# Altium PCB Board.PcbDoc (part 1 of 2)
Units mm, origin at the board's own origin, x right, y up, seen from the top; angles counter-clockwise.
Board outline 102.36 x 101.73 mm, 4 copper layers (Top Layer, Layer 1, Layer 2, Bottom Layer), stack 1.57 mm thick; 70 components, 60 nets, 262 pads, 135 vias.
Unrouted connection lines stored in the file: 4.
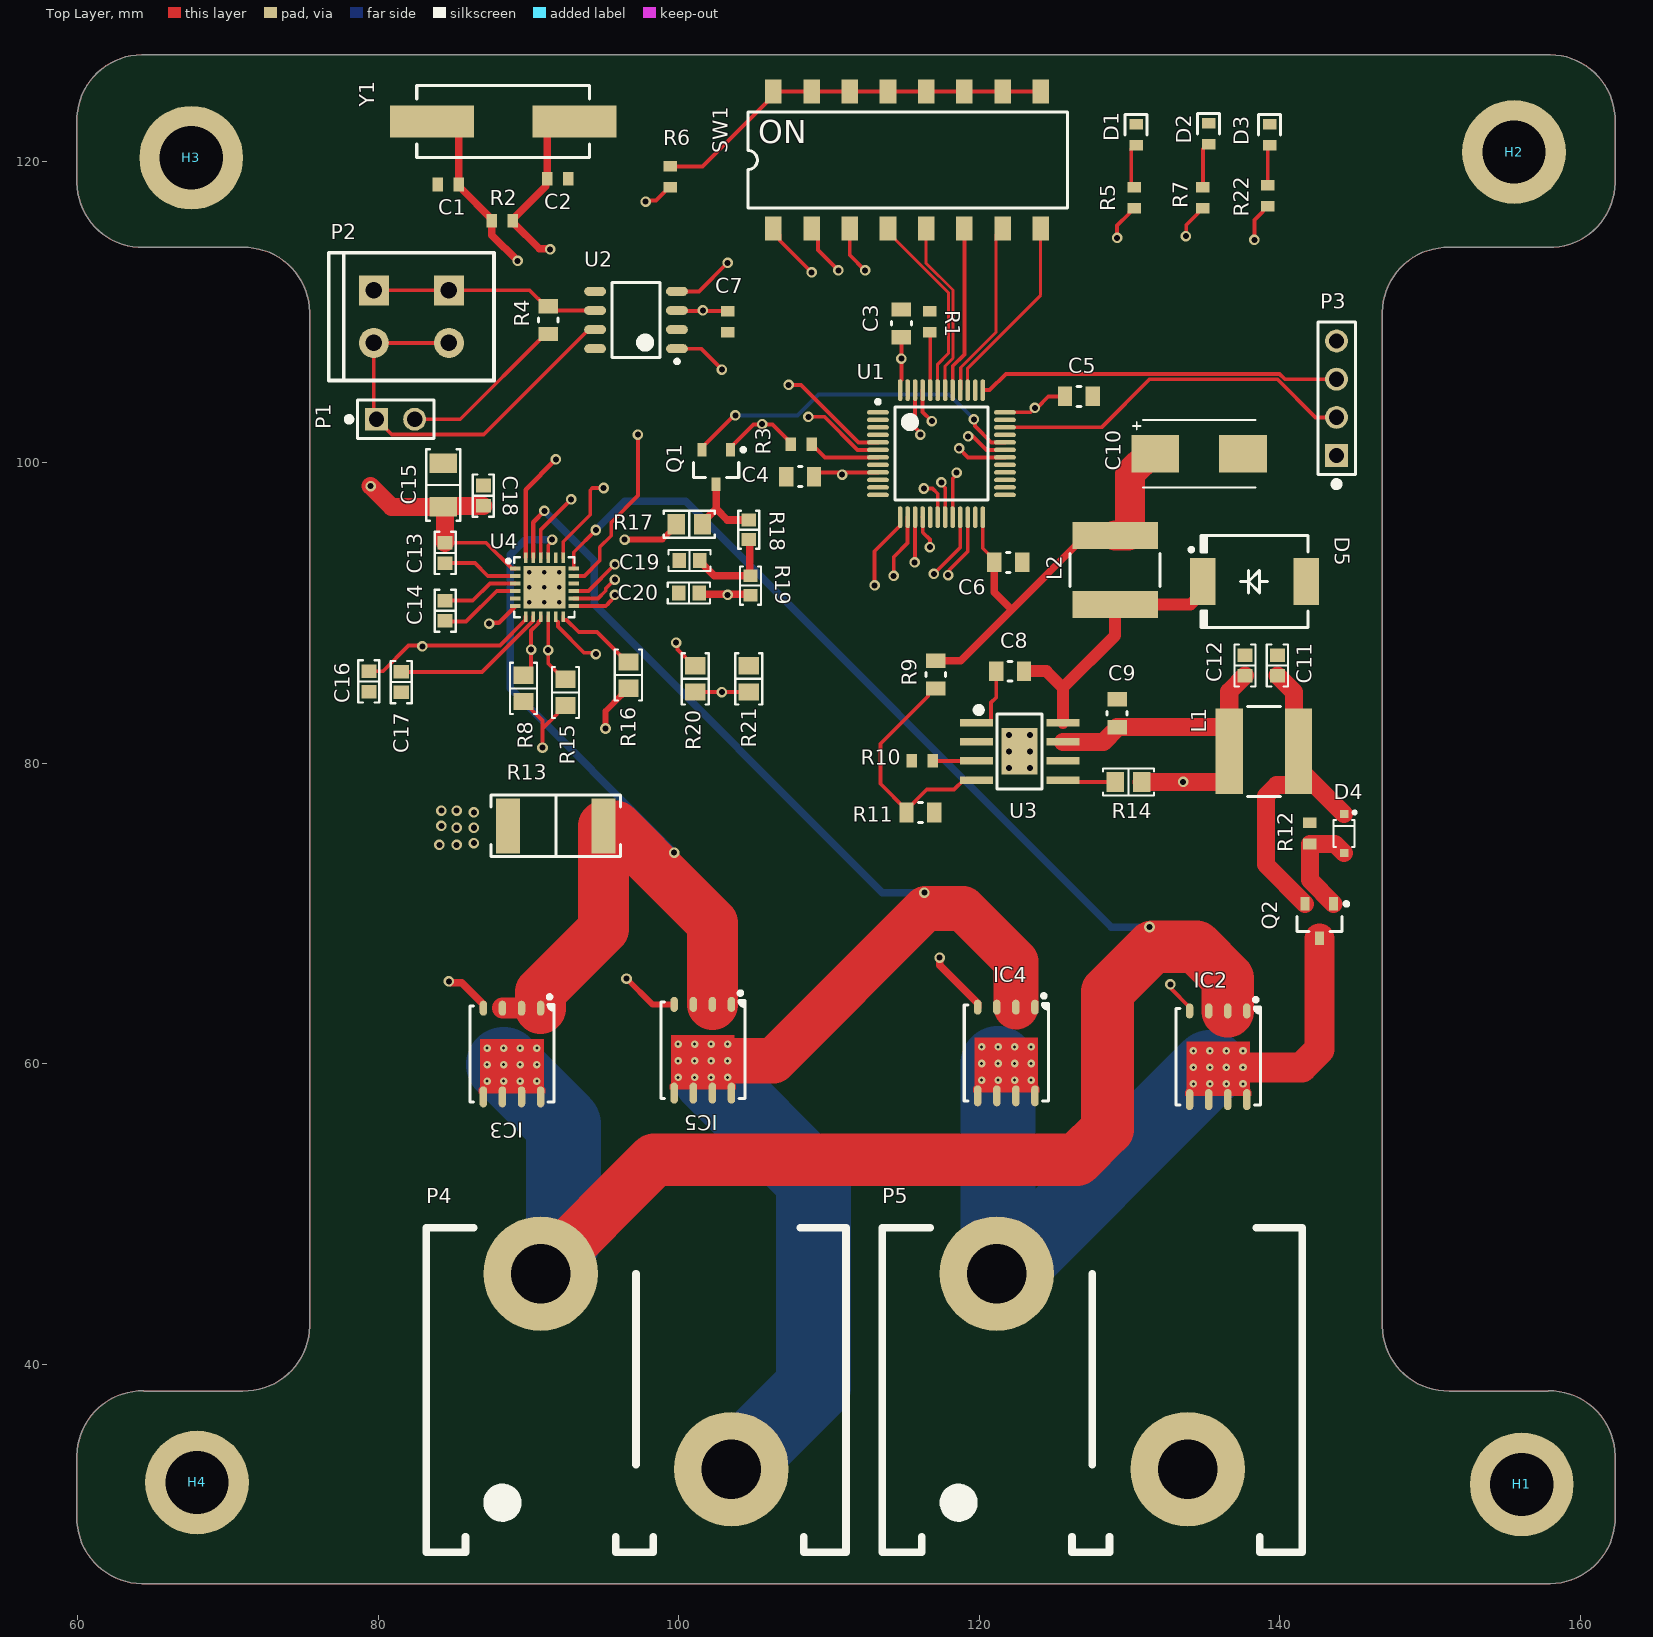
[diagram p0: Top Layer view]
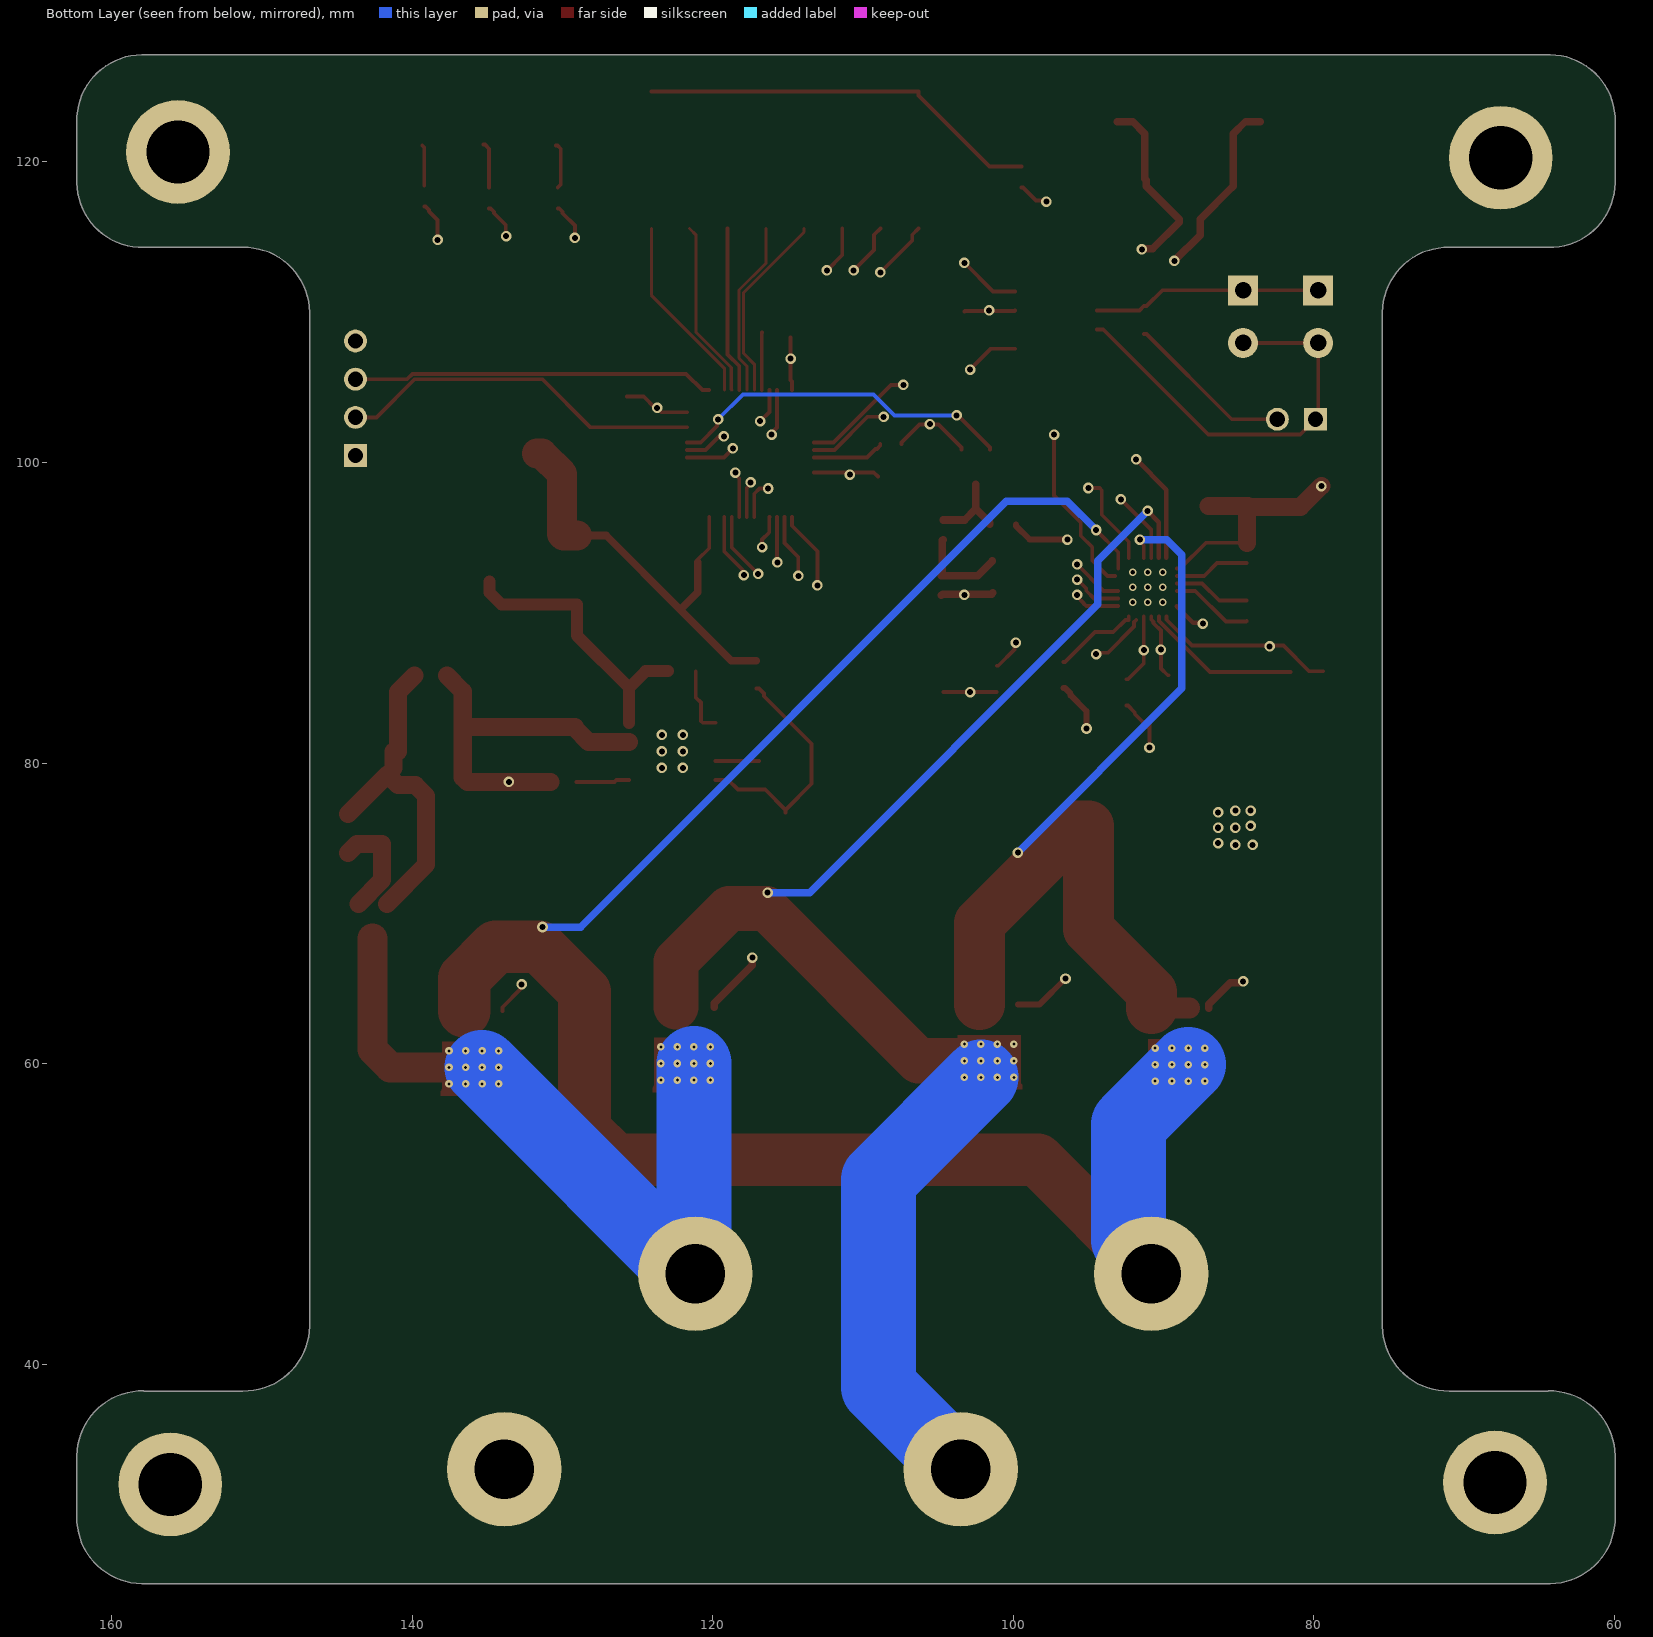
[diagram p1: Bottom Layer view, seen from below]
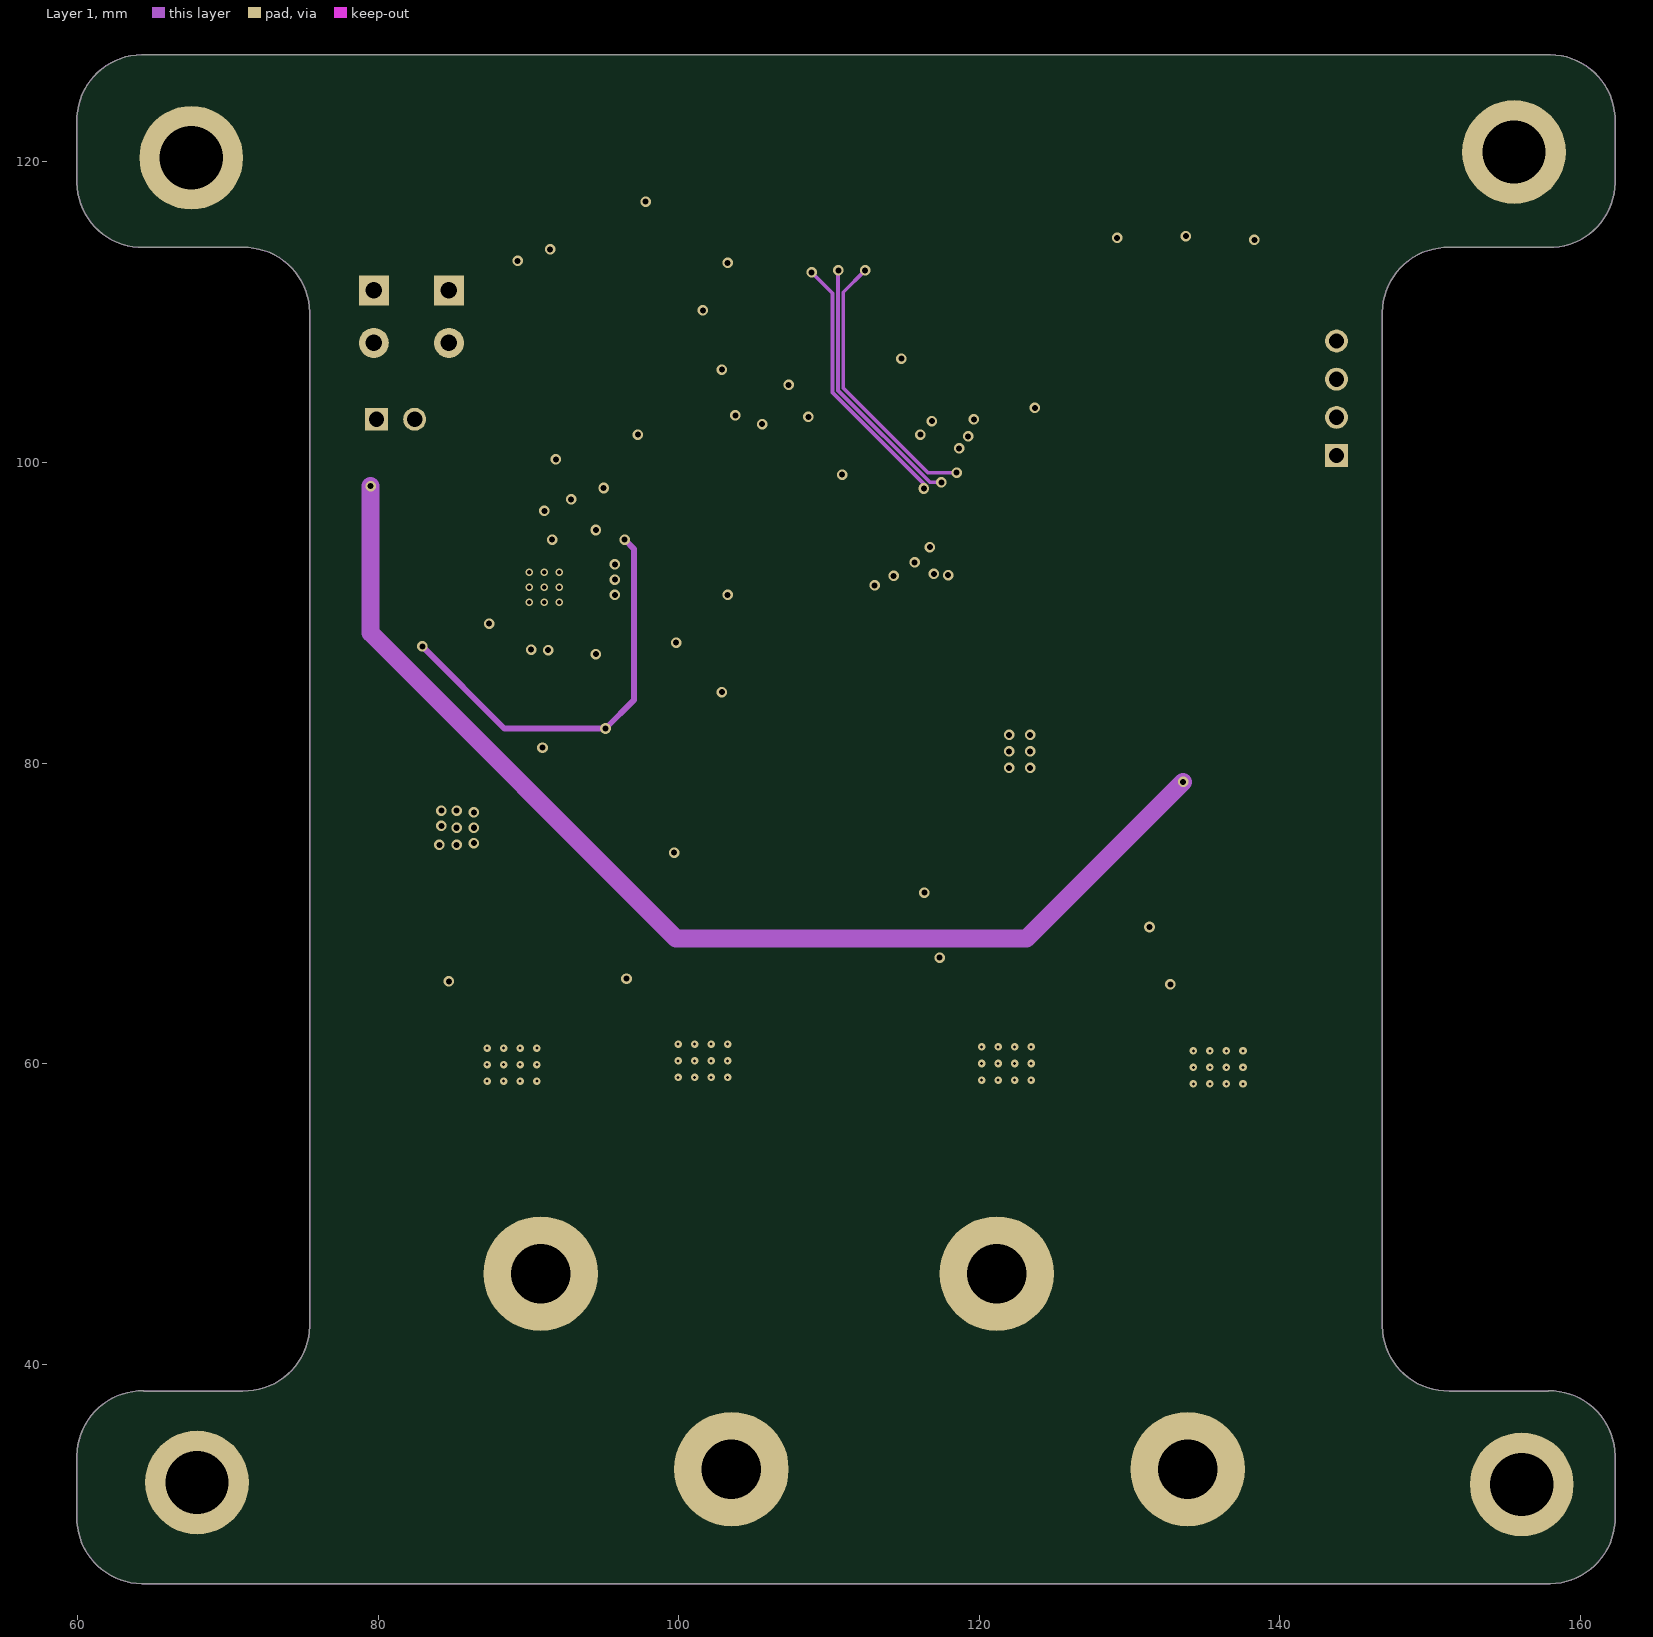
[diagram p2: Layer 1]
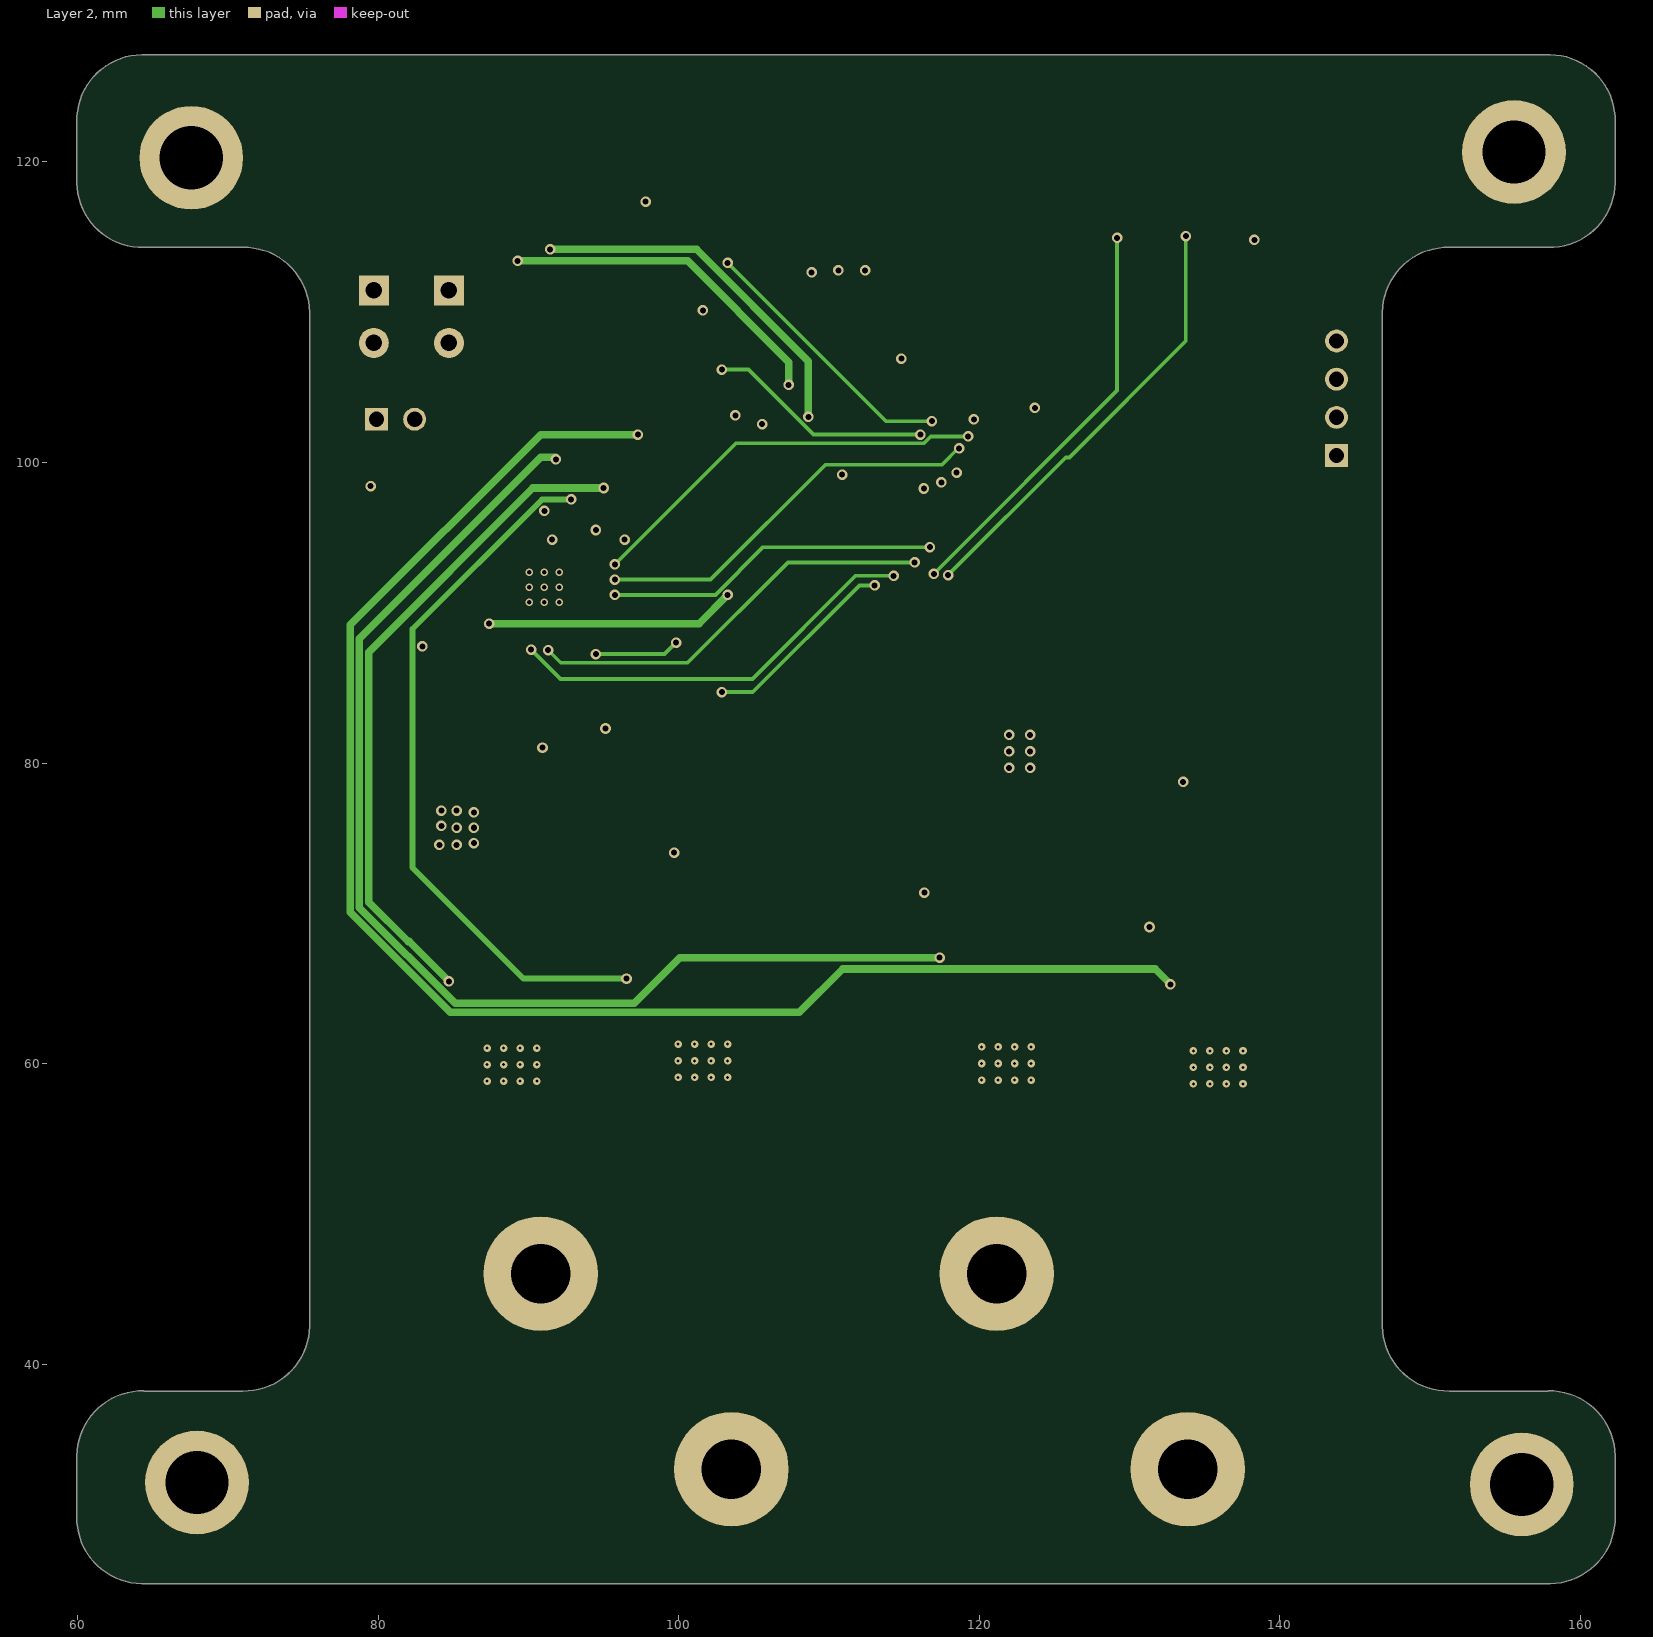
[diagram p3: Layer 2]
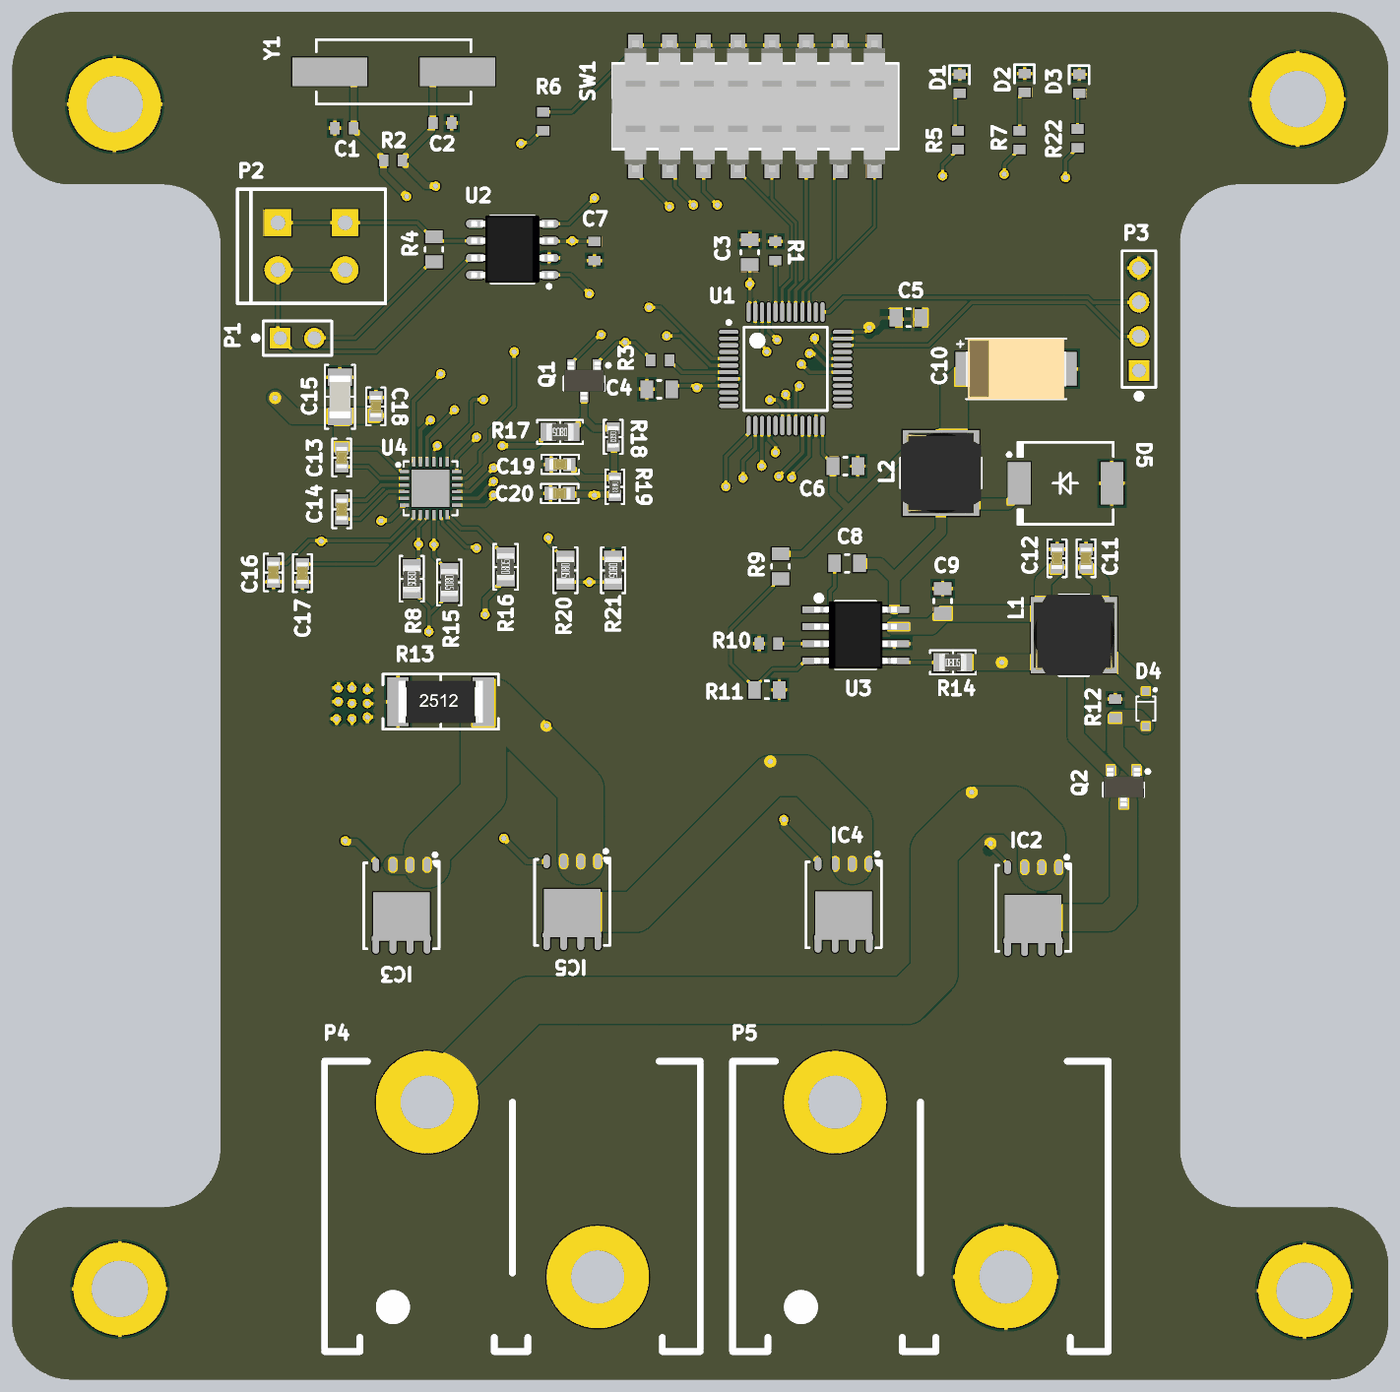
[diagram p4: 3D render of the assembled board from above, using the file's embedded part models]

## Layer stack, top to bottom
Top Solder: solder mask 0.0102, Solder Resist, Dk 3.8
Top Layer: signal copper 0.035
Dielectric 2: prepreg 0.2, PP-006, Dk 4.6
Layer 1: signal copper 0.0175
Dielectric 1: core 1.065, FR-4, Dk 4.8
Layer 2: signal copper 0.0175
Dielectric 3: prepreg 0.2, PP-006, Dk 4.6
Bottom Layer: signal copper 0.035
Bottom Solder: solder mask 0.0102, Solder Resist, Dk 3.8

## Board outline
59.944,29.845 ccw(c64.325,29.781) 64.262,25.4 157.988,25.4 ccw(c157.924,29.781) 162.306,29.845 162.306,33.909 ccw(c157.924,33.846) 157.861,38.227 157.861,38.212 151.257,38.212 cw(c151.194,42.593) 146.812,42.53 146.812,109.997 cw(c151.194,109.934) 151.257,114.315 157.861,114.315 157.861,114.3 ccw(c157.924,118.681) 162.306,118.618 162.306,122.682 ccw(c157.924,122.745) 157.988,127.127 64.262,127.127 ccw(c64.325,122.745) 59.944,122.682 59.944,118.618 ccw(c64.325,118.681) 64.389,114.3 64.389,114.315 70.993,114.315 cw(c71.056,109.934) 75.438,109.997 75.438,42.53 cw(c71.056,42.593) 70.993,38.212 64.389,38.212 64.389,38.227 ccw(c64.325,33.846) 59.944,33.909

## Design rules (kind name [scope] priority, off if disabled: settings)
Clearance [All] p1: gap=0.1 ignorepadtopadclearanceinfootprint=FALSE except(0: Arc-Hole Track-Hole SMDPad-Hole THPad-Hole Via-Hole Fill-Hole Poly-Hole Region-Hole Text-Hole; 0.127: SMDPad-SMDPad; 0.254: SMDPad-Via THPad-Via Via-Via; 0.54: THPad-THPad)
PolygonConnect [All] p1: connectstyle=Relief reliefconductorwidth=0.254 reliefentries=4 polygonreliefangle="90 Angle" airgapwidth=0.254
RoutingVias [All] p1: holewidth=50 width=50 viastyle="Through Hole" minholewidth=0.2 minwidth=0.45 maxholewidth=0.711 maxwidth=1.27
SolderMaskExpansion [All] p1: expansion=0.102 istentingtop=FALSE
Width [All] p1: maxlimit=50 minlimit=0.127 preferedwidth=0.254 midlayer1_minwidth=0.2 midlayer2_minwidth=0.2 minimp=50.000000 maximp=50.000000 favimp=50.000000
30 further rules are at their usual default settings.

## Classes and differential pairs
component class Motor_Control: C13 C14 C15 C16 C17 C18 C19 C20 IC2 IC3 IC4 IC5 P4 Q1 R8 R13 R15 R16 R17 R18 R19 R20 R21 U4
component class Power: C8 C9 C10 C11 C12 D3 D4 D5 L1 L2 P5 Q2 R9 R10 R11 R12 R14 R22 U3
component class MCU: C1 C2 C3 C4 C5 C6 H1 H2 H3 H4 R1 R2 R3 U1 Y1
component class IO: C7 D1 D2 P1 P2 P3 R4 R5 R6 R7 SW1 U2

## Components (designator, comment, footprint, x,y, rotation, side; value= is the part's Value field where it differs from the comment)
C1 "cap_single_np" chip_0603 84.647,118.491 r180 top
C2 "cap_single_np" chip_0603 91.948,118.872 r0 top
C3 "cap_single_np" chip_0805 114.808,109.256 r90 top
C4 "cap_single_np" chip_0805 108.077,99.06 r180 top
C5 "cap_single_np" chip_0805 126.619,104.394 r0 top
C6 "cap_single_np" chip_0805 121.92,93.345 r0 top
C7 "cap_single_np" chip_0603 103.251,109.347 r90 top
C8 "cap_single_np" chip_0805 122.047,86.106 r0 top
C9 "cap_single_np" chip_0805 129.159,83.312 r90 top
C10 "cap_single_p" chip_2917_AVX_TAJD 134.62,100.584 r0 top
C11 "0.22µF" "CAP 0603_1608" 139.827,86.487 r270 top
C12 "0.22µF" "CAP 0603_1608" 137.668,86.487 r270 top
C13 "1µF" "CAP 0603_1608" 84.455,93.98 r90 top
C14 "0.1µF" "CAP 0603_1608" 84.455,90.13 r90 top
C15 "10µF" "CAP 1206_3216 - 1.8MM" 84.328,98.499 r270 top
C16 "1µF" "CAP 0603_1608" 79.375,85.431 r270 top
C17 "1µF" "CAP 0603_1608" 81.534,85.384 r90 top
C18 "0.1µF" "CAP 0603_1608" 86.995,97.79 r270 top
C19 "0.1µF" "CAP 0603_1608" 100.711,93.472 r0 top
C20 "0.1µF" "CAP 0603_1608" 100.671,91.313 r0 top
D1 "diode_4" chip_0603_LED 130.429,121.793 r270 top
D2 "diode_4" chip_0603_LED 135.255,121.855 r270 top
D3 "diode_4" chip_0603_LED 139.319,121.793 r270 top
D4 "diode_1" sod323_0 144.272,75.311 r270 top
D5 "diode_2" do-214ab 138.303,92.075 r0 top
H1 "mounting_hole_0" #8-32_SOCKET_HEAD 156.083,32.004 r0 top
H2 "mounting_hole_0" #8-32_SOCKET_HEAD 155.575,120.65 r0 top
H3 "mounting_hole_0" #8-32_SOCKET_HEAD 67.564,120.269 r0 top
H4 "mounting_hole_0" #8-32_SOCKET_HEAD 67.945,32.131 r0 top
IC2 "BSC027N04LSGATMA1" "INFINEON PG-TDSON-8 6.15X5.32MM" 135.89,60.452 r270 top
IC3 "BSC027N04LSGATMA1" "INFINEON PG-TDSON-8 6.15X5.32MM" 88.9,60.635 r270 top
IC4 "BSC027N04LSGATMA1" "INFINEON PG-TDSON-8 6.15X5.32MM" 121.793,60.706 r270 top
IC5 "BSC027N04LSGATMA1" "INFINEON PG-TDSON-8 6.15X5.32MM" 101.6,60.889 r270 top
L1 "22µH" "WURTH WE-LQS 6045" 138.924,80.772 r180 top
L2 "22µH" "WURTH WE-LQS 6045" 129.032,92.837 r90 top
P1 "conn-2x1_0" hddr_2x1_0 81.163,102.87 r0 top
P2 "conn-2x1_0" TERM_3.50MM_2x1_0 79.709,111.45 r270 top
P3 "conn-4x1_0" HDDR_4x1_0 143.764,100.457 r90 top
P4 "conn-2x1_0" BARR_0.5IN_2x1_0 90.805,46.025 r0 top
P5 "conn-2x1_0" BARR_0.5IN_2x1_0 121.158,46.025 r0 top
Q1 "n-mosfet_1" sot-23-3 102.489,99.695 r270 top
Q2 "p-mosfet_1" sot-23-3 142.621,69.476 r270 top
R1 "res_single" chip_0603 116.712,109.347 r90 top
R2 "res_single" chip_0603 88.265,116.078 r0 top
R3 "res_single" chip_0603 108.142,101.219 r180 top
R4 "res_single" chip_0805 91.313,109.474 r90 top
R5 "res_single" chip_0603 130.302,117.602 r90 top
R6 "res_single" chip_0603 99.441,118.999 r270 top
R7 "res_single" chip_0603 134.874,117.602 r90 top
R8 "10 kOhms" "RES 0805_2012" 89.662,84.963 r270 top
R9 "res_single" chip_0805 117.094,85.888 r270 top
R10 "res_single" chip_0603 116.205,80.137 r180 top
R11 "res_single" chip_0805 116.078,76.708 r0 top
R12 "res_single" chip_0603 141.986,75.311 r90 top
R13 "4 mOhms" "RES 2512_6432" 91.821,75.819 r0 top
R14 "470 kOhms" "RES 0805_2012" 129.921,78.74 r0 top
R15 "10 kOhms" "RES 0805_2012" 92.456,84.695 r270 top
R16 "68 kOhms" "RES 0805_2012" 96.647,85.852 r90 top
R17 "10 kOhms" "RES 0805_2012" 100.697,95.885 r180 top
R18 "1.6 kOhms" "RES 0603_1608" 104.648,95.519 r270 top
R19 "1.6 kOhms" "RES 0603_1608" 104.775,91.806 r270 top
R20 "10 kOhms" "RES 0805_2012" 101.092,85.598 r270 top
R21 "22 kOhms" "RES 0805_2012" 104.648,85.598 r270 top
R22 "res_single" chip_0603 139.192,117.729 r90 top
SW1 "DIP_SW_8" A6S-8104-H 106.299,115.67 r90 top
U1 "STM32F103C8" LQFP48_0 117.475,100.584 r0 top
U2 "SN65HVD232" SO-8 97.155,109.474 r180 top
U3 "LM22670MRX-ADJ" SO-8_PPAD 122.682,80.772 r0 top
U4 "DRV8701PRGET" VQFN-24-EP 91.059,91.694 r0 top
Y1 "osc_xtal_2p_0" ABLS_AT49_OSC 88.316,122.682 r180 top

## Footprints (in the part's own frame and the unit in brackets; to place one, negate y for a bottom-side part, rotate by r counter-clockwise, add the part's x,y. Pads: shape width x height; smd on the part's side, far side on the other; paste and mask are expansions set on the pad)
#8-32_SOCKET_HEAD [mm] "Mounting hole for #8-32 socket head cap screw"
  round 6.9 hole 4.2: 0(0,0)
A6S-8104-H [mm]
  rect 1.6x1.1 smd: 1(-0.1,0) 2(-0.1,-2.54) 3(-0.1,-5.08) 4(-0.1,-7.62) 5(-0.1,-10.16) 6(-0.1,-12.7) 7(-0.1,-15.24) 8(-0.1,-17.78) 9(9,-17.78) 10(9,-15.24) 11(9,-12.7) 12(9,-10.16) 13(9,-7.62) 14(9,-5.08) 15(9,-2.54) 16(9,0)
  silkscreen extent 1.25,-19.55 7.65,1.7, body extent -0.45,-19.53 9.35,1.73, height 4.4
ABLS_AT49_OSC [mil] "ABLS Crystal Oscillator"
  rect 220x83 smd: 1(-187.01,0) 2(186.99,0)
  silkscreen extent -226,-94 226,94, body extent -224,-94 224,94, height 157
BARR_0.5IN_2x1_0 [mm] "Barrier Block, 0.5\" Pitch, 2 Pos, 1 Level, Molex 38969"
  round 7.62 hole 3.96: 1(0,0) 2(12.7,-13.005)
  silkscreen extent -7.62,-18.54 20.32,3.05, body extent -7.6,-18.55 20.3,3.05, height 22.6
"CAP 0603_1608" [mm] "Chip Capacitor, 2-Leads, Body 1.60x0.80mm, IPC Medium Density"
  rect 0.9x1 smd: 1(-0.675,0) 2(0.675,0)
  silkscreen extent -1.4,-0.7 1.4,0.7, body extent -0.8,-0.41 0.8,0.41, height 0.82
"CAP 1206_3216 - 1.8MM" [mm] "Chip Capacitor, 2-Leads, Body 3.25x1.60mm, IPC Medium Density"
  rect 1.3x1.8 smd: 1(-1.45,0) 2(1.45,0)
  silkscreen extent -2.37,-1.12 2.37,1.12, body extent -1.6,-0.8 1.6,0.8, height 1.8
chip_0603 [mm]
  rect 0.7x0.9 smd: 1(-0.7,0) 2(0.7,0)
  body extent -0.85,-0.45 0.85,0.45, height 0.6
chip_0603_LED [mm]
  rect 0.7x0.9 smd: 1(-0.7,0) 2(0.7,0)
  silkscreen extent -1.35,-0.75 0,0.72, body extent -0.85,-0.45 0.85,0.45, height 0.6
chip_0805 [mm]
  rect 0.95x1.3 smd: 1(-0.925,0) 2(0.925,0)
  silkscreen extent -0.13,-0.66 0.13,0.66, body extent -1.05,-0.65 1.05,0.65, height 0.6
chip_2917_AVX_TAJD [mm] "2917 footprint for AVX TAJD"
  rect 3.175x2.5 smd: 1(-2.921,0) 2(2.921,0)
  silkscreen extent -4.4,-2.25 3.75,2.25, body extent -3.75,-2.25 3.75,2.25, height 3.15
do-214ab [mm] "DO-214AB, SMC"
  rect 1.7x3.15 smd: 1(-3.45,0) 2(3.45,0)
  silkscreen extent -4.32,-3.05 3.55,3.05, body extent -3.56,-3.05 3.55,3.05, height 2.41
hddr_2x1_0 [mil] "0.1\" Header 2x1"
  rect 60x60 hole 40: 1(-50.39,0)
  round 60 hole 40: 2(49.61,0)
  silkscreen extent -128,-50 100,50, body extent -100,-50 100,50, height 336
HDDR_4x1_0 [mil]
  rect 60x60 hole 40: 1(0,0)
  round 60 hole 40: 2(100,0) 3(200,0) 4(300,0)
  silkscreen extent -83,-49 350,49, body extent -50,-50 350,50, height 336
"INFINEON PG-TDSON-8 6.15X5.32MM" [mm] "TDSON, 8-Leads, Body 6.15x5.32mm, Pitch 1.27mm, Thermal Pad 3.60x4.05mm, IPC Medium Density"
  oval 1x0.5 smd: 1(-3.05,1.905) 2(-3.05,0.635) 3(-3.05,-0.635) 4(-3.05,-1.905)
  oval 1.4x0.5 smd: 5(2.85,-1.905) 6(2.85,-0.635) 7(2.85,0.635) 8(2.85,1.905)
  Top Layer region: -1,2.1 -1,-2.1 2.059,-2.1 2.189,-2.126 2.3,-2.2 2.3,-2.2 2.6,-2.2 2.6,2.2 2.3,2.2 2.189,2.126 2.059,2.1 2.059,2.1
  silkscreen extent -3.92,-2.8 3.2,2.8, body extent -3.18,-2.74 3.18,2.75, height 1.1
LQFP48_0 [mm] "LQFP48, 7.00x7.00mm, 0.50mm"
  oval 1.45x0.3 smd: 1(-4.225,2.75) 2(-4.225,2.25) 3(-4.225,1.75) 4(-4.225,1.25) 5(-4.225,0.75) 6(-4.225,0.25) 7(-4.225,-0.25) 8(-4.225,-0.75) 9(-4.225,-1.25) 10(-4.225,-1.75) 11(-4.225,-2.25) 12(-4.225,-2.75) 25(4.225,-2.75) 26(4.225,-2.25) 27(4.225,-1.75) 28(4.225,-1.25) 29(4.225,-0.75) 30(4.225,-0.25) 31(4.225,0.25) 32(4.225,0.75) 33(4.225,1.25) 34(4.225,1.75) 35(4.225,2.25) 36(4.225,2.75)
  oval 0.3x1.45 smd: 13(-2.75,-4.225) 14(-2.25,-4.225) 15(-1.75,-4.225) 16(-1.25,-4.225) 17(-0.75,-4.225) 18(-0.25,-4.225) 19(0.25,-4.225) 20(0.75,-4.225) 21(1.25,-4.225) 22(1.75,-4.225) 23(2.25,-4.225) 24(2.75,-4.225) 37(2.75,4.225) 38(2.25,4.225) 39(1.75,4.225) 40(1.25,4.225) 41(0.75,4.225) 42(0.25,4.225) 43(-0.25,4.225) 44(-0.75,4.225) 45(-1.25,4.225) 46(-1.75,4.225) 47(-2.25,4.225) 48(-2.75,4.225)
  silkscreen extent -4.35,-3.1 3.1,3.57, body extent -3.5,-3.5 3.5,3.5, height 1.6
"RES 0603_1608" [mm] "Chip Resistor, 2-Leads, Body 1.60x0.80mm, IPC Medium Density"
  rect 0.85x0.95 smd: 1(-0.65,0) 2(0.65,0)
  silkscreen extent -1.27,-0.7 1.27,0.7, body extent -0.8,-0.4 0.8,0.4, height 0.45
"RES 0805_2012" [mm] "Chip Resistor, 2-Leads, Body 2.00x1.25mm, IPC Medium Density"
  rect 1.15x1.35 smd: 1(-0.875,0) 2(0.875,0)
  silkscreen extent -1.7,-0.9 1.7,0.9, body extent -1,-0.62 1,0.63, height 0.6
"RES 2512_6432" [mm] "Chip Resistor, 2-Leads, Body 6.30x3.15mm, IPC Medium Density"
  rect 1.6x3.65 smd: 1(-3.175,0) 2(3.175,0)
  silkscreen extent -4.3,-2.05 4.3,2.05, body extent -3.15,-1.58 3.15,1.57, height 0.7
SO-8 [mm] "SO-8 Package"
  oval 1.45x0.6 smd: 1(-2.725,1.905) 2(-2.725,0.635) 3(-2.725,-0.635) 4(-2.725,-1.905) 5(2.725,-1.905) 6(2.725,-0.635) 7(2.725,0.635) 8(2.725,1.905)
  silkscreen extent -2.85,-2.5 1.6,2.88, body extent -3.08,-2.5 3.08,2.5, height 2
SO-8_PPAD [mm]
  rect 2.2x0.5 smd: 1(-2.875,1.905) 2(-2.875,0.635) 3(-2.875,-0.635) 4(-2.875,-1.905) 5(2.875,-1.905) 6(2.875,-0.635) 7(2.875,0.635) 8(2.875,1.905)
  rect 2.4x3.1 smd: 9(0,0)
  silkscreen extent -2.92,-2.5 1.5,2.95, body extent -3.08,-2.5 3.08,2.5, height 2
sod323_0 [mm] "SOD-323, 1.25mm x 1.7mm"
  rect 0.55x0.55 smd: 1(-1.3,0) 2(1.3,0)
  silkscreen extent -1.5,-0.7 0.9,0.8, body extent -0.9,-0.67 0.9,0.67, height 1
sot-23-3 [mm] "SOT-23-3 package"
  rect 0.9x0.6 smd: 1(-1.15,0.95) 2(-1.15,-0.95) 3(1.15,0)
  silkscreen extent -1.27,-1.5 0.7,1.93, body extent -1.42,-1.5 1.42,1.5, height 1.2
TERM_3.50MM_2x1_0 [mm] "Terminal Block, 3.5mm pitch"
  rect 2x2 hole 1.1: 1(0,5) 1(0,0)
  round 2 hole 1.1: 2(3.5,5) 2(3.5,0)
  silkscreen extent -2.5,-3 6,8, body extent -2.5,-3 6,8, height 8.98
VQFN-24-EP [mm]
  rect 0.7x0.24 smd mask+0.065: 1(-1.95,1.25) 2(-1.95,0.75) 3(-1.95,0.25) 4(-1.95,-0.25) 5(-1.95,-0.75) 6(-1.95,-1.25) 13(1.95,-1.25) 14(1.95,-0.75) 15(1.95,-0.25) 16(1.95,0.25) 17(1.95,0.75) 18(1.95,1.25)
  rect 0.24x0.7 smd mask+0.065: 7(-1.25,-1.95) 8(-0.75,-1.95) 9(-0.25,-1.95) 10(0.25,-1.95) 11(0.75,-1.95) 12(1.25,-1.95) 19(1.25,1.95) 20(0.75,1.95) 21(0.25,1.95) 22(-0.25,1.95) 23(-0.75,1.95) 24(-1.25,1.95)
  rect 2.8x2.8 smd mask+0.065: 25(0,0)
  silkscreen extent -2.5,-2 2,2, body extent -2,-2 2,2, height 1
"WURTH WE-LQS 6045" [mm] "SMD Power Inductor, 2-Leads, body 6x6mm"
  rect 1.8x5.7 smd: 1(-2.3,0) 2(2.3,0)
  silkscreen extent -1.1,-3 1.1,3, body extent -3,-3 3,3, height 4.5

## Part data
C1 C2: library part CAP-00417, "CAP, 18pF, ±1%, 50V, C0G, 0603", Capacitance=18pF, Manufacturer=Murata, Manufacturer PN=GRM1885C1H180FA01J, Tolerance=±1%, Voltage Rating=50V, Part Number=CAP-00417, Type=C0G
C3 C4 C5 C6: library part CAP-00073, "CAP, 0.10uF, 10%, 100V, X7R, 0805", Capacitance=0.10uF, Manufacturer=Murata, Manufacturer PN=GRM21BR72A104KAC4L, Tolerance=10%, Voltage Rating=100V, Part Number=CAP-00073, Type=X7R
C7: library part CAP-00477, "CAP, 0.1uF, ±10%, 100V, X7R, 0603", Capacitance=0.1uF, Manufacturer=Murata, Manufacturer PN=GRM188R72A104KA35D, Tolerance=±10%, Voltage Rating=100V, Part Number=CAP-00477, Type=X7R
C8: library part CAP-00044, "CAP, 10000pF, 10%, 50V, X7R, 0805", Capacitance=10000pF, Manufacturer=Murata, Manufacturer PN=GRM216R71H103KA01J, Tolerance=10%, Voltage Rating=50V, Part Number=CAP-00044, Type=X7R
C9: library part CAP-00109, "CAP, 1uF, 10%, 50V, X7R, 0805", Capacitance=1uF, Manufacturer=Murata, Manufacturer PN=GRM21BR71H105KA12L, Tolerance=10%, Voltage Rating=50V, Part Number=CAP-00109, Type=X7R
C10: library part CAP-00550, "CAP, 100uF, ±10%, 16V, Tantalum, 2917", Capacitance=100uF, Manufacturer=AVX, Manufacturer PN=TAJD107K016RNJ, Tolerance=±10%, Voltage Rating=16V, Cost=$0.94, Part Number=CAP-00550, Type=Tantalum
C11 C12: library part 0603BB224K500YT, "CAP CER 0.22UF 50V X7R 0603", Device Package="0603 (1608 Metric)", Manufacturer="Knowles Novacap", Operating Temperature="-55°C ~ 125°C", Supplier Part Number 1=1763-1192-1-ND, Temperature Coefficient=X7R, Tolerance=±10%, Voltage - Rated=50V, Applications="General Purpose", Capacitance=0.22µF, ComponentLink1Description=Datasheet, ComponentLink1URL=https://www.knowlescapacitors.com/getattachment/6c8d48ef-fc2b-4752-ae2c-ce6c208de0c4/High-Capacitance-Chip.aspx, ComponentLink2Description="DigiKey Link", ComponentLink2URL=http://digikey.com/product-detail/en/knowles-novacap/0603BB224K500YT/1763-1192-1-ND/7304302, LastUpdated="9/2/2020 1:03:36 AM", Lifecycle Status=Active, Minimum Order=1, Mounting Type="Surface Mount, MLCC", Package / Case="0603 (1608 Metric)", Packaging=TapeAndReel, Part Number=0603BB224K500YT, Part Status=Active, PartId=2162, Price=0.52, Series=-, Size / Dimension="0.060\" L x 0.030\" W (1.52mm x 0.76mm)", Supplier 1=DigiKey, Thickness (Max)="0.035\" (0.89mm)"
C13 C16 C17: library part CL10A105KO5LNNC, "CAP CER 1UF 16V X5R 0603", Device Package="0603 (1608 Metric)", Manufacturer="Samsung Electro-Mechanics", Operating Temperature="-55°C ~ 85°C", Supplier Part Number 1=1276-1862-1-ND, Temperature Coefficient=X5R, Tolerance=±10%, Voltage - Rated=16V, Applications="General Purpose", Capacitance=1µF, ComponentLink1Description=Datasheet, ComponentLink1URL=http://www.samsungsem.com/kr/support/product-search/mlcc/CL10A105KO5LNNC.jsp, ComponentLink2Description="DigiKey Link", ComponentLink2URL=http://digikey.com/product-detail/en/samsung-electro-mechanics/CL10A105KO5LNNC/1276-1862-1-ND/3889948, Features="Low Profile", LastUpdated="9/2/2020 1:03:22 AM", Lifecycle Status=Active, Minimum Order=1, Mounting Type="Surface Mount, MLCC", Package / Case="0603 (1608 Metric)", Packaging=TapeAndReel, Part Number=CL10A105KO5LNNC, Part Status=Active, PartId=10042, Price=0.01, Series=CL, Size / Dimension="0.063\" L x 0.031\" W (1.60mm x 0.80mm)", Supplier 1=DigiKey, Thickness (Max)="0.020\" (0.50mm)"
C14 C18 C19 C20: library part C0603C104K5RAC7411, "CAP CER 0.1UF 50V X7R 0603", Device Package="0603 (1608 Metric)", Manufacturer=KEMET, Operating Temperature="-55°C ~ 125°C", Supplier Part Number 1=399-7374-2-ND, Temperature Coefficient=X7R, Tolerance=±10%, Voltage - Rated=50V, Applications="Bypass, Decoupling", Capacitance=0.1µF, ComponentLink1Description=Datasheet, ComponentLink1URL=https://api.kemet.com/component-edge/download/datasheet/C0603C104K5RAC7411.pdf, ComponentLink2Description="DigiKey Link", ComponentLink2URL=http://digikey.com/product-detail/en/kemet/C0603C104K5RAC7411/399-7374-2-ND/3317013, LastUpdated="9/2/2020 1:03:36 AM", Lifecycle Status=Active, Minimum Order=15000, Mounting Type="Surface Mount, MLCC", Package / Case="0603 (1608 Metric)", Packaging=TapeAndReel, Part Number=C0603C104K5RAC7411, Part Status=Active, PartId=2233, Price=0.02, Series="SMD Comm X7R", Size / Dimension="0.063\" L x 0.031\" W (1.60mm x 0.80mm)", Supplier 1=DigiKey, Thickness (Max)="0.035\" (0.90mm)"
C15: library part CL31B106KBHNNNE, "CAP CER 10UF 50V X7R 1206", Device Package="1206 (3216 Metric)", Manufacturer="Samsung Electro-Mechanics", Operating Temperature="-55°C ~ 125°C", Supplier Part Number 1=1276-6767-1-ND, Temperature Coefficient=X7R, Tolerance=±10%, Voltage - Rated=50V, Applications="General Purpose", Capacitance=10µF, ComponentLink1Description=Datasheet, ComponentLink1URL=http://www.samsungsem.com/kr/support/product-search/mlcc/CL31B106KBHNNNE.jsp, ComponentLink2Description="DigiKey Link", ComponentLink2URL=http://digikey.com/product-detail/en/samsung-electro-mechanics/CL31B106KBHNNNE/1276-6767-1-ND/5961626, LastUpdated="9/2/2020 1:05:42 AM", Lifecycle Status=Active, Minimum Order=1, Mounting Type="Surface Mount, MLCC", Package / Case="1206 (3216 Metric)", Packaging=TapeAndReel, Part Number=CL31B106KBHNNNE, Part Status=Active, PartId=19563, Price=0.09, Series=CL, Size / Dimension="0.126\" L x 0.063\" W (3.20mm x 1.60mm)", Supplier 1=DigiKey, Thickness (Max)="0.071\" (1.80mm)"
D1 D2: library part DIO-00049, "LED, Blue, 0603, Low current, HELI2 Series", Current Rating=30mA, Forward Voltage=2.65V, Manufacturer=Kingbright, Manufacturer PN=APT1608LVBC/D, Power Rating=120mW, Reverse Breakdown Voltage=5V, Cost=0.58, Part Number=DIO-00049, Type=LED
D3: library part DIO-00050, "LED, Green, 0603, Low current, HELI2 Series", Current Rating=30mA, Forward Voltage=2.65V, Manufacturer=Kingbright, Manufacturer PN=APT1608LZGCK, Power Rating=120mW, Reverse Breakdown Voltage=5V, Cost=0.58, Part Number=DIO-00050, Type=LED
D4: library part DIO-00019, "Dio Zen, 10V, 2%, 200mW, SOD-323", Forward Voltage=900mV, Manufacturer="ON Semi", Manufacturer PN=MM3Z10VST1G, Power Rating=200mW, Reverse Breakdown Voltage=10V, Tolerance=2%, Part Number=DIO-00019, Type=Zener
D5: library part DIO-00048, "Dio, Schottky, 5A, 700mV, 60V, SMC", Current Rating=5A, Forward Voltage=700mV, Manufacturer="Diodes Incorporated", Manufacturer PN=B560C-13-F, Reverse Breakdown Voltage=60V, Cost=0.5, Part Number=DIO-00048, Type=Schottky
H1 H2 H3 H4: library part MISC-00027, "#8-32 Mounting Hole for Socket Head Cap Screw", Part Number=MISC-00027
IC2 IC3 IC4 IC5: "MOSFET N-CH 40V 100A TDSON-8", Current - Continuous Drain (Id) @ 25°C="24A (Ta), 100A (Tc)", Drain to Source Voltage (Vdss)=40V, Drive Voltage (Max Rds On,  Min Rds On)="4.5V, 10V", Input Capacitance (Ciss) (Max) @ Vds="6800pF @ 20V", Manufacturer="Infineon Technologies", Operating Temperature="-55°C ~ 150°C (TJ)", Package / Case=8-PowerTDFN, Power Dissipation (Max)="2.5W (Ta), 83W (Tc)", Supplier Device Package=PG-TDSON-8-1, Supplier Part Number 1=BSC027N04LSGATMA1CT-ND, ComponentLink1Description=Datasheet, ComponentLink1URL=https://www.infineon.com/dgdl/BSC027N04LSG_rev1.04.pdf?folderId=db3a3043156fd5730115c7d50620107c&fileId=db3a30431689f4420116c4323646080c, ComponentLink2Description="DigiKey Link", ComponentLink2URL=http://digikey.com/product-detail/en/infineon-technologies/BSC027N04LSGATMA1/BSC027N04LSGATMA1CT-ND/2231028, FET Type=N-Channel, Gate Charge (Qg) (Max) @ Vgs="85nC @ 10V", LastUpdated="9/2/2020 1:27:16 AM", Lifecycle Status=Active, Minimum Order=1, Mounting Type="Surface Mount", Packaging=TapeAndReel, Part Number=BSC027N04LSGATMA1, Part Status=Active, Price=0.59, Rds On (Max) @ Id, Vgs="2.7mOhm @ 50A, 10V", Series=OptiMOS™, Supplier 1=DigiKey, Technology="MOSFET (Metal Oxide)", Vgs (Max)=±20V, Vgs(th) (Max) @ Id="2V @ 49µA"
L1 L2: library part 74404064220, "FIXED IND 22UH 1.8A 89 MOHM SMD", Current - Saturation=2.2A, Current Rating (Amps)=1.8A, DC Resistance (DCR)=89mOhm, Device Package=Nonstandard, Frequency - Self Resonant=15MHz, Inductance Frequency - Test=100kHz, Manufacturer="Würth Elektronik", Operating Temperature="-40°C ~ 125°C", Supplier Device Package=6045, Supplier Part Number 1=732-5554-1-ND, Tolerance=±20%, ComponentLink1Description=Datasheet, ComponentLink1URL=https://katalog.we-online.de/pbs/datasheet/74404064220.pdf, ComponentLink2Description="DigiKey Link", ComponentLink2URL=http://digikey.com/product-detail/en/w-rth-elektronik/74404064220/732-5554-1-ND/4865447, Height - Seated (Max)="0.177\" (4.50mm)", Inductance=22µH, LastUpdated="9/2/2020 1:30:28 AM", Lifecycle Status=Active, Material - Core=Ferrite, Minimum Order=1, Mounting Type="Surface Mount", Package / Case=Nonstandard, Packaging=TapeAndReel, Part Number=74404064220, Part Status=Active, PartId=3707, Price=0.69, Series=WE-LQS, Shielding=Shielded, Size / Dimension="0.236\" L x 0.236\" W (6.00mm x 6.00mm)", Supplier 1=DigiKey, Type=Wirewound
P1: library part CONN-00055, "Header, 2x1, 0.1\"", Manufacturer=Samtec, Manufacturer PN=TSW-102-07-F-S, Cost=0.2, Levels=1, Part Number=CONN-00055, Positions per level=2, Type=Header
P2: library part CONN-00023, "Term Blk, 2 Pos, 8A, 3.5mm Pitch, Screwless", Current=8, Manufacturer="Phoenix Contact", Manufacturer PN=1861933, Cost=0.79, Levels=1, Part Number=CONN-00023, Positions per level=2, Type="Terminal Block", Weight=1.13
P3: library part CONN-00029, "Header 4x1, 0.1\"", Levels=1, Part Number=CONN-00029, Positions per level=4, Type=Header
P4 P5: library part CONN-00001, "Barrier Blk, 2 Pos, 50 A", Current=50, Manufacturer=Molex, Manufacturer PN=389690002, Cost=1.68, Levels=1, Part Number=CONN-00001, Positions per level=2, Type="Barrier Block", Weight=7.5
Q1: library part XSTR-00017, "XSTR NMOS, 220mA, 50V, Vgs 1.3V, SOT-23-3", Manufacturer="ON Semi", Manufacturer PN=BSS138, Max Current=220mA, Max Power=360mW, Max Voltage=50V, Cost=0.31, Part Number=XSTR-00017, Type=NFET, Vgs/Vce=1.3V
Q2: library part XSTR-00009, "XSTR NMOS, 1.5A, 40V, Vgs 2.5V, SOT-23-3", Manufacturer=NXP, Manufacturer PN=PMV250EPEAR, Max Current=1.5A, Max Power=480mW, Max Voltage=40V, Part Number=XSTR-00009, Type=PFET, Vgs/Vce=2.5V
R1 R3 R12: library part RES-00301, "RES SMD 100K OHM 1% 1/4W 0603", Manufacturer=Panasonic, Manufacturer PN=ERJ-PA3F1003V, Power Rating=0.25W, Resistance=100k, Tolerance=1%, Part Number=RES-00301
R2: library part RES-00362, "RES SMD 1M OHM 1% 1/4W 0603", Manufacturer=Panasonic, Manufacturer PN=ERJ-PA3F1004V, Power Rating=0.25W, Resistance=1M, Tolerance=1%, Part Number=RES-00362
R4: library part RES-00183, "RES SMD 120 OHM 1% 1/8W 0805", Manufacturer="Rohm Semiconductor", Manufacturer PN=KTR10EZPF1200, Power Rating=0.125W, Resistance=120, Tolerance=1%, Part Number=RES-00183
R5 R7 R22: library part RES-00221, "RES SMD 330 OHM 1% 1/4W 0603", Manufacturer=Panasonic, Manufacturer PN=ERJ-PA3F3300V, Power Rating=0.25W, Resistance=330, Tolerance=1%, Part Number=RES-00221
R6: library part RES-00188, "RES SMD 150 OHM 1% 1/4W 0603", Manufacturer=Panasonic, Manufacturer PN=ERJ-PA3F1500V, Power Rating=0.25W, Resistance=150, Tolerance=1%, Part Number=RES-00188
R8 R15 R17 R20: library part SG73S2ATTD103J, "RES 10K OHM 5% 1/4W 0805", Device Package="0805 (2012 Metric)", Manufacturer="KOA Speer Electronics, Inc.", Operating Temperature="-55°C ~ 155°C", Power (Watts)="0.25W, 1/4W", Ratings=AEC-Q200, Supplier Device Package=0805, Supplier Part Number 1=2019-SG73S2ATTD103JCT-ND, Temperature Coefficient=±200ppm/°C, Tolerance=±5%, ComponentLink1Description=Datasheet, ComponentLink1URL=http://www.koaspeer.com/catimages/Products/SG73S/SG73S.pdf, ComponentLink2Description="DigiKey Link", ComponentLink2URL=http://digikey.com/product-detail/en/koa-speer-electronics-inc/SG73S2ATTD103J/2019-SG73S2ATTD103JCT-ND/10280158, Composition="Thick Film", Features="Automotive AEC-Q200, Moisture Resistant, Pulse Withstanding", Height - Seated (Max)="0.024\" (0.60mm)", LastUpdated="9/2/2020 1:14:56 AM", Lifecycle Status=Active, Minimum Order=1, Number of Terminations=2, Package / Case="0805 (2012 Metric)", Packaging=TapeAndReel, Part Number=SG73S2ATTD103J, Part Status=Active, PartId=40412, Price=0.01, Resistance="10 kOhms", Series=SG73S, Size / Dimension="0.079\" L x 0.049\" W (2.00mm x 1.25mm)", Supplier 1=DigiKey
R9: library part RES-00280, "RES SMD 1.54K OHM 1% 1/8W 0805", Manufacturer="Rohm Semiconductor", Manufacturer PN=KTR10EZPF1541, Power Rating=0.125W, Resistance=1.54k, Tolerance=1%, Part Number=RES-00280
R10: library part RES-00553, "RES SMD 75K OHM 1% 1/4W 0603", Manufacturer=Panasonic, Manufacturer PN=ERJ-PA3F7502V, Power Rating=0.25W, Resistance=75k, Tolerance=1%, Part Number=RES-00553
R11: library part RES-00361, "RES SMD 1K OHM 1% 1/8W 0805", Manufacturer="Rohm Semiconductor", Manufacturer PN=KTR10EZPF1001, Power Rating=0.125W, Resistance=1k, Tolerance=1%, Part Number=RES-00361
R13: library part PA2512FKE7T0R004E, "RES 0.004 OHM 1% 3W 2512", Device Package="2512 (6432 Metric)", Manufacturer=Yageo, Operating Temperature="-55°C ~ 170°C", Power (Watts)=3W, Ratings=AEC-Q200, Supplier Device Package=2512, Supplier Part Number 1=YAG6087CT-ND, Temperature Coefficient=±50ppm/°C, Tolerance=±1%, ComponentLink1Description=Datasheet, ComponentLink1URL=http://www.yageo.com/documents/recent/PYu-PA_E_51_RoHS_10.pdf, ComponentLink2Description="DigiKey Link", ComponentLink2URL=http://digikey.com/product-detail/en/yageo/PA2512FKE7T0R004E/YAG6087CT-ND/9696541, Composition="Metal Element", Features="Automotive AEC-Q200, Current Sense, Moisture Resistant", Height - Seated (Max)="0.035\" (0.88mm)", LastUpdated="9/2/2020 1:27:06 AM", Lifecycle Status=Active, Minimum Order=1, Number of Terminations=2, Package / Case="2512 (6432 Metric)", Packaging=TapeAndReel, Part Number=PA2512FKE7T0R004E, Part Status=Active, Price=0.32, Resistance="4 mOhms", Series=PA_E, Size / Dimension="0.250\" L x 0.125\" W (6.35mm x 3.18mm)", Supplier 1=DigiKey
R14: library part RMCF0805FT470K, "RES 470K OHM 1% 1/8W 0805", Device Package="0805 (2012 Metric)", Manufacturer="Stackpole Electronics Inc", Operating Temperature="-55°C ~ 155°C", Power (Watts)="0.125W, 1/8W", Ratings=AEC-Q200, Supplier Device Package=0805, Supplier Part Number 1=RMCF0805FT470KCT-ND, Temperature Coefficient=±100ppm/°C, Tolerance=±1%, ComponentLink1Description=Datasheet, ComponentLink1URL=https://www.seielect.com/catalog/sei-rmcf_rmcp.pdf, ComponentLink2Description="DigiKey Link", ComponentLink2URL=http://digikey.com/product-detail/en/stackpole-electronics-inc/RMCF0805FT470K/RMCF0805FT470KCT-ND/5049799, Composition="Thick Film", Features="Automotive AEC-Q200", Height - Seated (Max)="0.026\" (0.65mm)", LastUpdated="9/2/2020 1:15:14 AM", Lifecycle Status=Active, Minimum Order=1, Number of Terminations=2, Package / Case="0805 (2012 Metric)", Packaging=CutTape, Part Number=RMCF0805FT470K, Part Status=Active, PartId=32589, Price=0.10, Resistance="470 kOhms", Series=RMCF, Size / Dimension="0.079\" L x 0.049\" W (2.00mm x 1.25mm)", Supplier 1=DigiKey
R16: library part ERA-6ARW683V, "RES 68K OHM 0.05% 1/8W 0805", Device Package="0805 (2012 Metric)", Manufacturer="Panasonic Electronic Components", Operating Temperature="-55°C ~ 155°C", Power (Watts)="0.125W, 1/8W", Ratings=AEC-Q200, Supplier Device Package=0805, Supplier Part Number 1=P68KBSCT-ND, Temperature Coefficient=±10ppm/°C, Tolerance=±0.05%, ComponentLink1Description=Datasheet, ComponentLink1URL=https://industrial.panasonic.com/cdbs/www-data/pdf/RDM0000/AOA0000C307.pdf, ComponentLink2Description="DigiKey Link", ComponentLink2URL=http://digikey.com/product-detail/en/panasonic-electronic-components/ERA-6ARW683V/P68KBSCT-ND/3073432, Composition="Thin Film", Features="Automotive AEC-Q200", Height - Seated (Max)="0.024\" (0.60mm)", LastUpdated="9/2/2020 1:14:49 AM", Lifecycle Status=Active, Minimum Order=1, Number of Terminations=2, Package / Case="0805 (2012 Metric)", Packaging=TapeAndReel, Part Number=ERA-6ARW683V, Part Status=Active, PartId=43651, Price=0.24, Resistance="68 kOhms", Series=ERA-6A, Size / Dimension="0.079\" L x 0.049\" W (2.00mm x 1.25mm)", Supplier 1=DigiKey
R18 R19: library part ERJ-PA3J162V, "RES SMD 1.6K OHM 5% 1/4W 0603", Device Package="0603 (1608 Metric)", Manufacturer="Panasonic Electronic Components", Operating Temperature="-55°C ~ 155°C", Power (Watts)="0.25W, 1/4W", Ratings=AEC-Q200, Supplier Device Package=0603, Supplier Part Number 1=P1.6KBZCT-ND, Temperature Coefficient=±200ppm/°C, Tolerance=±5%, ComponentLink1Description=Datasheet, ComponentLink1URL=https://industrial.panasonic.com/cdbs/www-data/pdf/RDO0000/AOA0000C331.pdf, ComponentLink2Description="DigiKey Link", ComponentLink2URL=http://digikey.com/product-detail/en/panasonic-electronic-components/ERJ-PA3J162V/P1.6KBZCT-ND/5036262, Composition="Thick Film", Features="Automotive AEC-Q200, Pulse Withstanding", Height - Seated (Max)="0.022\" (0.55mm)", LastUpdated="9/2/2020 1:10:00 AM", Lifecycle Status=Active, Minimum Order=1, Number of Terminations=2, Package / Case="0603 (1608 Metric)", Packaging=TapeAndReel, Part Number=ERJ-PA3J162V, Part Status=Active, PartId=16547, Price=0.01, Resistance="1.6 kOhms", Series=ERJ, Size / Dimension="0.063\" L x 0.031\" W (1.60mm x 0.80mm)", Supplier 1=DigiKey
R21: library part RC0805FR-0722KL, "RES SMD 22K OHM 1% 1/8W 0805", Device Package="0805 (2012 Metric)", Manufacturer=Yageo, Operating Temperature="-55°C ~ 155°C", Power (Watts)="0.125W, 1/8W", Supplier Device Package=0805, Supplier Part Number 1=311-22.0KCRCT-ND, Temperature Coefficient=±100ppm/°C, Tolerance=±1%, ComponentLink1Description=Datasheet, ComponentLink1URL=https://www.yageo.com/upload/media/product/productsearch/datasheet/rchip/PYu-RC_Group_51_RoHS_L_10.pdf, ComponentLink2Description="DigiKey Link", ComponentLink2URL=http://digikey.com/product-detail/en/yageo/RC0805FR-0722KL/311-22.0KCRCT-ND/730683, Composition="Thick Film", Features="Moisture Resistant", Height - Seated (Max)="0.024\" (0.60mm)", LastUpdated="9/2/2020 1:15:14 AM", Lifecycle Status=Active, Minimum Order=1, Number of Terminations=2, Package / Case="0805 (2012 Metric)", Packaging=CutTape, Part Number=RC0805FR-0722KL, Part Status=Active, PartId=32623, Price=0.10, Resistance="22 kOhms", Series=RC, Size / Dimension="0.079\" L x 0.049\" W (2.00mm x 1.25mm)", Supplier 1=DigiKey
SW1: library part MISC-00045, "DIP Switch, 8 Switches, SMD, 25mA, 24V", Manufacturer=Omron, Manufacturer PN=A6S-8104-H, Cost=2.85, Part Number=MISC-00045
U1: library part UCTRL-00008, "STM32 M3, LQFP-48", Manufacturer=ST, Manufacturer PN=STM32F103C8, Part Number=UCTRL-00008
U2: library part IFACE-00008, "CANbus Transceiver, Single channel, SN65HVD232", Manufacturer=TI, Manufacturer PN=SN65HVD232DR, Cost=2.01, Part Number=IFACE-00008
U3: library part PWREG-00055, "REG, Buck, 3A, 4.5~42V Input, Simple Switcher, SOIC-8-EP", Manufacturer=TI, Max Current=3A, Voltage Range In="4.7 ~ 42V", Voltage Range Out="1.285 ~ 37V", Cost=4.31, Fixed/Adj=Adj, Manufacturer PN=LM22670MRX-ADJ, Part Number=PWREG-00055, Reg Type="SW Buck"
U4: library part PWREG-00045, "Dual Half-Bridge Driver, PWM, 5.9-45V, DRV8701P", Manufacturer=TI, Voltage Range In="5.9 - 45V", Cost=2.37, Manufacturer PN=DRV8701PRGET, Part Number=PWREG-00045, Reg Type="Bridge Driver"
Y1: library part OSC-00002, "XTAL, 8MHz, 18pF, 20ppm", Frequency=8.000M, Load Capacitance=18pF, Manufacturer=Abracon, Manufacturer PN=ABLS-8.000MHZ-B2-T, Tolerance=20ppm, ESR=80, Part Number=OSC-00002, Stability=50ppm

## Via types
v1: diameter 0.7, hole 0.4, Top Layer to Bottom Layer, 78 vias
v2: diameter 0.5, hole 0.2, Top Layer to Bottom Layer, tented top, 48 vias
v3: diameter 0.5, hole 0.3, Top Layer to Bottom Layer, tented both sides, 9 vias

## Nets (pads, with @x,y where several pads share a name; then routed paths per layer and width w, separated by ;. In a path a pad name is that pad's centre, name@x,y a point inside that pad or via, vN(x,y) a via of type N, cw(c..) or ccw(c..) an arc to the next point about the centre after c; other vN are vias at no path point)
+3.3: C3.1 C4.1 C5.1 C6.1 C7.2 C10.1 L2.2 P3.1 Q1.1 R3.2 R6.2 R8.2 R9.1 R15.2 R22.1 U1.9 U1.24 U1.36 U1.48 U2.3 | length 61.3
  Top Layer w0.254: R8.2 89.762,84.088 90.21,83.64 90.21,83.54 90.932,82.818 90.932,82.296 ; v1(90.932,81.026) 90.932,82.296 ; R15.2 92.356,83.82 91.908,83.372 91.908,83.272 90.932,82.296 ; v1(97.79,117.348) 97.875,117.433 98.475,117.433 99.341,118.299 R6.2 ; U2.3 99.911,110.078 103.22,110.078 C7.2 ; Q1.1 103.439,100.995 104.975,102.531 105.521,102.531 v1(105.537,102.547) ; v1@105.537,102.616 105.622,102.531 106.23,102.531 107.442,101.319 R3.2 ; C4.1 109.276,99.334 U1.9 ; U1.48 114.725,105.396 114.808,105.479 C3.1 ; U1.24 120.225,94.29 120.995,93.52 C6.1 ; U1.36 123.4,103.334 v1(123.698,103.632) 123.825,103.632 124.587,104.394 C5.1 ; v1(138.303,114.808) 138.303,116.14 138.869,116.706 138.869,116.806 139.092,117.029 R22.1
  Top Layer w0.5: R9.1 118.758,86.813 122.145,90.199 ; C6.1 120.995,91.349 122.145,90.199 ; L2.2 127.082,95.137 122.145,90.199
  Top Layer w2: L2.2 129.915,95.137 130.015,95.237 130.015,99.237 131.362,100.584 C10.1
  other v1: 110.871,99.187 114.808,106.905 101.6,110.109
AVDD: C16.1 R16.1 R17.2 U4.7 | length 47.4
  Top Layer w0.254: C16.1 80.31,86.106 82.017,87.813 82.931,87.813 88.095,87.813 89.809,89.528 U4.7
  Top Layer w0.4: v1(95.123,82.296) 95.123,83.453 96.172,84.502 96.172,84.602 96.547,84.977 R16.1 ; v1(96.393,94.869) 98.906,94.869 99.822,95.785 R17.2
  Layer 1 w0.4: v1(82.931,87.757) 88.392,82.296 v1(95.123,82.296) 97.028,84.201 97.028,94.234 v1(96.393,94.869)
CAN_H: P1.1 P2.2 U2.7 | length 28
  Top Layer w0.254: P2.2@84.709,107.95 79.709,107.95 79.709,103.044 80.899,101.854 87.02,101.854 94.005,108.839 U2.7
CAN_L: P2.1 R4.2 U2.6 | length 15.3
  Top Layer w0.254: P2.1@79.709,111.45 84.709,111.45 90.087,111.45 91.138,110.399 R4.2 91.603,110.109 U2.6
GND: C1.2 C2.2 C3.2 C4.2 C5.2 C6.2 C7.1 C9.2 C10.2 C11.1 C12.1 C15.1 C16.2 C17.1 C18.1 C19.1 C20.1 D1.1 D2.1 D3.1 D5.2 H1.0 H2.0 H3.0 H4.0 P3.4 P5.2 R1.2 R10.2 R11.2 R12.2 R13.1 R21.1 U1.8 U1.23 U1.35 U1.47 U2.2 U3.6 U3.9 U4.5 U4.16 U4.20 U4.25
  other v1: 84.074,74.549 85.217,74.549 86.36,74.676 85.217,75.692 86.36,75.692 84.201,75.819 86.36,76.708 84.201,76.835 85.217,76.835 121.982,79.672 123.382,79.672 121.982,80.772 123.382,80.772 121.982,81.872 123.382,81.872
  other v3: 90.059,90.694 91.059,90.694 92.059,90.694 90.059,91.694 91.059,91.694 92.059,91.694 90.059,92.694 91.059,92.694 92.059,92.694
MOTOR+: IC2.1 IC2.2 IC2.3 IC3.5 IC3.6 IC3.7 IC3.8 P4.1 U4.18 | length 131.8
  Top Layer w0.254: U4.18 93.009,94.025 v1(94.488,95.504)
  Top Layer w3.5: P4.1 98.374,53.594 126.474,53.594 128.524,55.644 128.524,64.77 131.519,67.765 134.419,67.765 136.525,65.659 IC2.2
  Bottom Layer w0.5: v1(94.488,95.504) 96.393,97.409 100.457,97.409 128.778,69.088 v1(131.318,69.088)
  Bottom Layer w5: v2(88.35,59.935) 92.329,55.956 92.329,48.258 90.805,46.734 P4.1
  other v2: 87.25,58.835 88.35,58.835 89.45,58.835 90.55,58.835 87.25,59.935 89.45,59.935 90.55,59.935 87.25,61.035 88.35,61.035 89.45,61.035 90.55,61.035
MOTOR-: IC4.1 IC4.2 IC4.3 IC5.5 IC5.6 IC5.7 IC5.8 P4.2 U4.23 | length 102.2
  Top Layer w0.3: U4.23 90.309,96.024 v1(91.059,96.774)
  Top Layer w3: v2(101.05,60.189) v2(102.15,60.189) 106.29,60.189 116.423,70.322 118.908,70.322 122.428,66.802 IC4.2
  Bottom Layer w0.5: v1(91.059,96.774) 94.361,93.472 94.361,90.551 113.538,71.374 v1(116.332,71.374)
  Bottom Layer w5: v2(102.15,59.089) 108.966,52.273 108.966,38.481 P4.2
  other v2: 99.95,59.089 101.05,59.089 103.25,59.089 99.95,60.189 103.25,60.189 99.95,61.289 101.05,61.289 102.15,61.289 103.25,61.289
NetC8_1: C8.1 U3.1 | length 4.5
  Top Layer w0.254: U3.1 120.657,82.677 120.78,82.8 120.78,84.02 121.122,84.363 C8.1
NetC8_2: C8.2 D5.1 L2.1 U3.8 | length 19.2
  Top Layer w0.8: C8.2 124.46,86.106 125.557,85.009 ; U3.8 125.557,85.009 ; D5.1 134.853,91.35 134.04,90.537 L2.1 129.032,88.484 125.557,85.009
NetC11_2: C11.2 D4.1 L1.1 Q2.2 | length 21.8
  Top Layer w1.2: C11.2 140.924,84.715 L1.1@140.924,80.772 ; L1.1@141.224,79.659 L1.1 ; Q2.2 139.065,73.232 139.065,77.819 139.768,78.522 140.924,78.522 141.642,79.24 D4.1
NetC13_1: C13.1 U4.2 | length 5
  Top Layer w0.254: C13.1 86.43,93.305 87.291,92.444 U4.2
NetC14_1: C14.1 U4.4 | length 5.5
  Top Layer w0.254: C14.1 84.502,89.408 85.847,89.408 87.883,91.444 U4.4
NetC14_2: C14.2 U4.3 | length 5.1
  Top Layer w0.254: C14.2 86.291,90.805 87.43,91.944 U4.3
NetC17_2: C17.2 U4.8 | length 10.5
  Top Layer w0.254: C17.2 86.915,86.059 90.302,89.446 90.302,89.737 U4.8
NetC19_2: C19.2 R18.2 R19.1 | length 6.3
  Top Layer w0.5: C19.2 101.386,93.422 102.352,92.456 R19.1 104.712,92.519 104.712,94.805 R18.2
NetD1_2: D1.2 R5.2 | length 3.1
  Top Layer w0.254: R5.2 130.106,118.498 130.106,120.87 130.329,121.093 D1.2
NetD2_2: D2.2 R7.2 | length 3.1
  Top Layer w0.254: R7.2 134.874,120.874 135.155,121.155 D2.2
NetD3_2: D3.2 R22.2 | length 2.7
  Top Layer w0.254: R22.2 139.192,120.966 D3.2
NetD4_2: D4.2 Q2.1 R12.1 | length 7.2
  Top Layer w1.2: Q2.1 141.986,72.211 R12.1 143.672,74.611 D4.2
NetIC2_4: IC2.4 U4.17 | length 116.1
  Top Layer w0.254: U4.17@93.232,92.451 93.721,92.451 94.742,93.472 94.742,94.361 95.504,95.123 95.504,96.012 97.282,97.79 v1(97.282,101.854) ; v1(132.715,65.278) 132.715,65.022 133.985,63.752 IC2.4
  Layer 2 w0.5: v1(97.282,101.854) 90.805,101.854 78.14,89.189 78.14,70.069 84.801,63.408 108.02,63.408 110.906,66.294 131.699,66.294 v1(132.715,65.278)
NetIC3_1: IC3.1 IC3.2 IC3.3 IC5.1 IC5.2 IC5.3 R13.2 U4.21 | length 60.6
  Top Layer w0.254: U4.21 91.309,94.49 91.567,94.748 v1(91.567,94.869)
  Top Layer w1.4: IC3.3 IC3.2 IC3.1
  Top Layer w3.4: IC3.1 90.805,64.77 94.996,68.961 R13.2 95.771,75.819 99.949,71.641 102.235,69.355 IC5.2
  Bottom Layer w0.5: v1(91.567,94.869) 89.789,94.869 88.773,93.853 88.773,84.963 v1(99.695,74.041)
NetIC3_4: IC3.4 U4.19 | length 53.7
  Top Layer w0.254: U4.19 92.309,94.722 94.107,96.52 94.107,98.149 94.256,98.298 v1(94.996,98.298)
  Top Layer w0.5: v1(84.709,65.47) 84.812,65.367 85.563,65.367 86.995,63.935 IC3.4
  Layer 2 w0.5: v1(84.709,65.47) 82.055,68.124 81.99,68.124 79.375,70.739 79.375,87.376 90.297,98.298 v1(94.996,98.298)
NetIC4_4: IC4.4 U4.24 | length 90.2
  Top Layer w0.3: U4.24 89.809,98.191 v1(91.821,100.203)
  Top Layer w0.5: v1(117.348,67.056) 117.348,66.546 119.888,64.006 IC4.4
  Layer 2 w0.5: v1@91.821,100.33 90.805,100.33 78.74,88.265 78.74,70.384 85.116,64.008 97.028,64.008 100.076,67.056 v1(117.348,67.056)
NetIC5_4: IC5.4 U4.22 | length 55.9
  Top Layer w0.254: U4.22 90.809,95.508 v1(92.837,97.536)
  Top Layer w0.4: v1(96.52,65.659) 98.24,63.939 IC5.4
  Layer 2 w0.4: v1(92.837,97.536) 90.902,97.536 82.281,88.915 82.281,73.04 89.662,65.659 v1(96.52,65.659)
NetP1_2: P1.2 R4.1 | length 11.2
  Top Layer w0.254: P1.2 85.459,102.87 91.138,108.549 R4.1
NetP3_2: P3.2 U1.34 | length 24.4
  Top Layer w0.254: U1.34 128.115,102.334 131.318,105.537 139.827,105.537 142.367,102.997 P3.2
NetP3_3: P3.3 U1.37 | length 24.1
  Top Layer w0.254: U1.37 120.684,104.809 121.766,105.891 139.974,105.891 140.328,105.537 P3.3
NetQ1_2: Q1.2 U1.32 | length 23.3
  Top Layer w0.254: Q1.2 101.539,100.995 103.668,103.124 v1(103.759,103.124) ; v1(119.634,102.87) 119.706,102.798 119.706,102.417 120.789,101.334 U1.32
  Bottom Layer w0.254: v1(103.759,103.124) 107.896,103.124 109.293,104.521 117.983,104.521 v1(119.634,102.87)
NetQ1_3: Q1.3 R17.1 R18.1 | length 5.5
  Top Layer w0.5: R17.1 101.572,95.985 102.489,96.902 ; Q1.3 102.489,96.902 ; R18.1 103.222,96.169 102.489,96.902
NetR1_1: R1.1 U1.44 | length 3.8
  Top Layer w0.254: R1.1 116.725,108.634 U1.44
NetR3_1: R3.1 U1.7 | length 4.8
  Top Layer w0.254: R3.1 108.842,101.119 109.065,100.896 109.165,100.896 109.727,100.334 U1.7
NetR5_1: R5.1 U1.21 | length 34.4
  Top Layer w0.254: v1(116.967,92.583) 118.725,94.341 U1.21 ; v1(129.159,114.935) 129.159,115.759 129.979,116.579 129.979,116.679 130.202,116.902 R5.1
  Layer 2 w0.254: v1(116.967,92.583) 129.159,104.775 v1(129.159,114.935)
NetR6_1: R6.1 SW1.9 SW1.10 SW1.11 SW1.12 SW1.13 SW1.14 SW1.15 SW1.16 | length 26.8
  Top Layer w0.254: R6.1 101.578,119.699 106.299,124.42 SW1.16 SW1.15 SW1.14 SW1.13 SW1.12 SW1.11 SW1.10 SW1.9
NetR7_1: R7.1 U1.22 | length 36
  Top Layer w0.254: v1(117.921,92.504) 118.006,92.59 118.006,92.86 119.225,94.079 U1.22 ; v1(133.731,115.062) 133.765,115.096 133.765,115.793 134.551,116.579 134.551,116.679 134.774,116.902 R7.1
  Layer 2 w0.254: v1(117.921,92.504) 125.75,100.333 125.987,100.333 133.731,108.077 v1(133.731,115.062)
NetR8_1: R8.1 U1.14 U4.9 | length 36.5
  Top Layer w0.254: R8.1 89.722,85.838 90.17,86.286 v1(90.17,87.55) 90.17,88.813 90.656,89.299 90.656,89.375 90.809,89.528 U4.9 ; v1(114.3,92.456) 114.3,93.712 115.225,94.637 U1.14
  Layer 2 w0.254: v1(90.17,87.55) 92.122,85.598 104.902,85.598 111.76,92.456 v1(114.3,92.456)
NetR9_2: R9.2 R11.1 U3.4 | length 16.1
  Top Layer w0.254: R11.1 R11.1@115.153,76.883 ; R9.2 116.919,84.963 116.571,84.615 116.571,84.44 113.411,81.28 113.411,78.625 R11.1@115.153,76.883 ; U3.4 118.957,78.867 118.322,78.232 116.502,78.232 R11.1@115.153,76.883
NetR10_1: R10.1 U3.3 | length 2.9
  Top Layer w0.254: R10.1 U3.3
NetR14_1: R14.1 U3.5 | length 3.5
  Top Layer w0.254: U3.5 126.407,78.867 126.534,78.74 R14.1
NetR15_1: R15.1 U1.15 U4.10 | length 35.2
  Top Layer w0.254: U4.10 91.309,87.503 91.309,86.617 92.356,85.57 R15.1 ; v1(115.697,93.345) 115.716,93.364 115.716,96.35 U1.15
  Layer 2 w0.254: v1(91.313,87.503) 92.144,86.672 100.584,86.672 107.257,93.345 v1(115.697,93.345)
NetR16_2: R16.2 U4.12 | length 5.7
  Top Layer w0.254: U4.12 92.309,89.528 92.316,89.521 92.532,89.521 93.344,88.709 94.565,88.709 96.547,86.727 R16.2
NetR20_1: R20.1 U4.11 | length 11.6
  Top Layer w0.254: U4.11@91.816,89.521 91.955,89.382 91.955,89.074 93.695,87.334 94.403,87.334 v1(94.488,87.249) ; v1(99.822,88.011) 99.907,87.926 99.907,87.558 100.992,86.473 R20.1
  Layer 2 w0.254: v1(94.488,87.249) 99.06,87.249 v1(99.822,88.011)
NetR20_2: R20.2 R21.2 U1.13 | length 21.9
  Top Layer w0.254: R20.2 v1(102.87,84.723) R21.2 ; v1(113.03,91.821) 113.03,94.089 114.725,95.784 U1.13
  Layer 2 w0.254: v1(102.87,84.723) 104.916,84.723 112.014,91.821 v1(113.03,91.821)
NetSW1_1: SW1.1 U1.18 | length 24.1
  Top Layer w0.254: SW1.1 106.722,115.147 106.722,114.766 v1(108.839,112.649) ; v1(116.304,98.265) 116.873,98.265 117.225,97.913 U1.18
  Layer 1 w0.254: v1(108.839,112.649) 110.236,111.252 110.236,104.648 116.356,98.528 116.356,98.317 v1(116.304,98.265)
NetSW1_2: SW1.2 U1.19 | length 23.4
  Top Layer w0.254: SW1.2 109.262,115.147 109.262,114.131 v1(110.617,112.776) ; v1(117.475,98.679) 117.475,98.558 117.725,98.308 U1.19
  Layer 1 w0.254: v1(110.617,112.776) 110.59,112.749 110.59,104.795 116.706,98.679 v1(117.475,98.679)
NetSW1_3: SW1.3 U1.20 | length 24.6
  Top Layer w0.254: SW1.3 111.379,113.792 v1(112.395,112.776) ; U1.20 118.225,98.927 118.491,99.193 v1(118.491,99.314)
  Layer 1 w0.254: v1(112.395,112.776) 110.944,111.325 110.944,104.941 116.571,99.314 v1(118.491,99.314)
NetSW1_4: SW1.4 U1.43 | length 12.7
  Top Layer w0.2: SW1.4 113.919,115.32 117.937,111.302 117.937,108.713 117.937,107.25 117.225,106.538 U1.43
NetSW1_5: SW1.5 U1.42 | length 11.7
  Top Layer w0.2: SW1.5 116.459,113.242 118.237,111.464 118.237,106.934 117.725,106.422 U1.42
NetSW1_6: SW1.6 U1.41 | length 11.1
  Top Layer w0.254: U1.41 118.225,106.414 118.999,107.188 SW1.6
NetSW1_7: SW1.7 U1.40 | length 11.9
  Top Layer w0.2: U1.40 118.76,104.844 118.76,106.314 121.089,108.643 121.089,115.12 SW1.7
NetSW1_8: SW1.8 U1.39 | length 12.8
  Top Layer w0.2: U1.39 119.225,106.271 124.079,111.125 SW1.8
NetU1_16: U1.16 U4.13 | length 27.6
  Top Layer w0.254: U4.13 95.143,90.444 95.323,90.624 95.323,90.645 95.743,91.065 v1(95.743,91.186) ; U1.16 116.234,96.35 116.234,95.348 116.713,94.869 v1(116.713,94.361)
  Layer 2 w0.254: v1(95.743,91.186) 102.435,91.186 105.61,94.361 v1(116.713,94.361)
NetU1_30: U1.30 U4.14 | length 33.2
  Top Layer w0.254: U4.14 94.627,90.944 95.142,91.459 95.142,91.601 v1(95.743,92.202) ; v1(118.645,100.938) 119.249,100.334 U1.30
  Layer 2 w0.254: v1(95.743,92.202) 102.108,92.202 109.755,99.849 117.502,99.849 118.591,100.938 v1(118.645,100.938)
NetU1_31: U1.31 U4.15 | length 33.3
  Top Layer w0.254: U4.15 93.984,91.444 95.743,93.203 v1(95.743,93.218) ; v1(119.253,101.727) 119.58,101.727 120.473,100.834 U1.31
  Layer 2 w0.254: v1(95.743,93.218) 103.802,101.277 116.317,101.277 116.767,101.727 v1(119.253,101.727)
NetU1_45: U1.45 U2.4 | length 24.4
  Top Layer w0.254: U2.4 101.346,111.379 v1(103.251,113.284) ; U1.45 116.225,103.358 v1(116.84,102.743)
  Layer 2 w0.254: v1(103.251,113.284) 113.792,102.743 v1(116.84,102.743)
NetU1_46: U1.46 U2.1 | length 21.7
  Top Layer w0.254: U2.1 101.473,107.569 v1(102.87,106.172) ; U1.46 115.725,102.328 116.078,101.975 v1(116.078,101.854)
  Layer 2 w0.254: v1(102.87,106.172) 104.648,106.172 108.966,101.854 v1(116.078,101.854)
OSC_IN: C1.1 R2.1 U1.5 Y1.2 | length 42.1
  Top Layer w0.254: v1(107.315,105.156) 108.134,105.156 111.956,101.334 U1.5
  Top Layer w0.5: Y1.2 84.543,122.682 85.347,121.878 C1.1 85.347,118.391 85.447,118.291 85.452,118.291 87.565,116.178 R2.1 87.565,115.127 v1(89.281,113.411)
  Layer 2 w0.5: v1(89.281,113.411) 100.584,113.411 107.315,106.68 v1(107.315,105.156)
OSC_OUT: C2.1 R2.2 U1.6 Y1.1 | length 41.7
  Top Layer w0.254: v1(108.621,103.033) 108.628,103.04 109.685,103.04 111.891,100.834 U1.6
  Top Layer w0.5: v1(91.44,114.173) 91.402,114.211 90.732,114.211 88.965,115.978 R2.2 88.965,116.178 91.148,118.361 91.148,118.772 C2.1 91.248,121.878 92.052,122.682 Y1.1
  Layer 2 w0.5: v1(91.44,114.173) 101.179,114.173 108.621,106.73 v1(108.621,103.033)
VCC: IC2.5 IC2.6 IC2.7 IC2.8 IC4.5 IC4.6 IC4.7 IC4.8 P5.1 Q2.3 | length 46.9
  Top Layer w2: v2(137.54,59.752) 141.449,59.752 142.621,60.924 Q2.3
  Bottom Layer w5: v2(121.243,60.006) v2(121.243,58.906) 121.243,46.11 P5.1 121.613,46.025 v2(134.24,58.652) v2(135.34,59.752)
  other v2: 135.34,58.652 136.44,58.652 137.54,58.652 120.143,58.906 122.343,58.906 123.443,58.906 134.24,59.752 136.44,59.752 120.143,60.006 122.343,60.006 123.443,60.006 134.24,60.852 135.34,60.852 136.44,60.852 137.54,60.852 120.143,61.106 121.243,61.106 122.343,61.106 123.443,61.106
VCC_PROT: C9.1 C12.2 C13.2 C15.2 C18.2 L1.2 R14.2 U3.7 U4.1 | length 117.3
  Top Layer w0.254: C13.2 87.182,94.655 88.893,92.944 U4.1
  Top Layer w1.2: v1(79.502,98.425) 80.878,97.049 C15.2 ; C13.2 84.455,96.999 84.405,97.049 C15.2 ; C18.2 86.979,97.099 84.378,97.099 C15.2 ; U3.7 128.254,81.407 129.159,82.312 C9.1 136.324,82.387 L1.2@136.624,82.087 ; R14.2 v1(133.56,78.74) 136.324,78.74 136.624,79.04 L1.2 L1.2@136.624,82.087 ; C12.2 136.624,84.768 L1.2@136.624,82.087
  Layer 1 w1.2: v1(79.502,98.425) 79.502,88.646 99.822,68.326 123.146,68.326 v1(133.56,78.74)
VREF: C20.2 R19.2 U4.6 | length 22.2
  Top Layer w0.3: v1@87.541,89.319 88.014,89.319 89.109,90.414 U4.6
  Top Layer w0.5: C20.2 101.425,91.234 104.697,91.234 R19.2
  Layer 2 w0.5: v1(87.376,89.281) 101.346,89.281 v1(103.251,91.186)
pads on no net: U1.1 U1.2 U1.3 U1.4 U1.10 U1.11 U1.12 U1.17 U1.25 U1.26 U1.27 U1.28 U1.29 U1.33 U1.38 U2.5 U2.8 U3.2

## Polygon pours and split planes (outlines as drawn)
GND on Top Layer "GND_L01_P001" (solid, shelved, pour order 1): 59.944,29.845 ccw(c64.325,29.781) 64.262,25.4 157.988,25.4 ccw(c157.924,29.781) 162.306,29.845 162.306,33.909 ccw(c157.924,33.846) 157.861,38.227 157.861,38.212 151.257,38.212 cw(c151.194,42.593) 146.812,42.53 146.812,109.997 cw(c151.194,109.934) 151.257,114.315 157.861,114.315 157.861,114.3 ccw(c157.924,118.681) 162.306,118.618 162.306,122.682 ccw(c157.924,122.745) 157.988,127.127 64.262,127.127 ccw(c64.325,122.745) 59.944,122.682 59.944,118.618 ccw(c64.325,118.681) 64.389,114.3 64.389,114.315 70.993,114.315 cw(c71.056,109.934) 75.438,109.997 75.438,42.53 cw(c71.056,42.593) 70.993,38.212 64.389,38.212 64.389,38.227 ccw(c64.325,33.846) 59.944,33.909
+3.3 on Layer 1 "+3.3_L02_P002" (solid, shelved, pour order 2): 59.944,29.845 ccw(c64.325,29.781) 64.262,25.4 157.988,25.4 ccw(c157.924,29.781) 162.306,29.845 162.306,33.909 ccw(c157.924,33.846) 157.861,38.227 157.861,38.212 151.257,38.212 cw(c151.194,42.593) 146.812,42.53 146.812,109.997 cw(c151.194,109.934) 151.257,114.315 157.861,114.315 157.861,114.3 ccw(c157.924,118.681) 162.306,118.618 162.306,122.682 ccw(c157.924,122.745) 157.988,127.127 64.262,127.127 ccw(c64.325,122.745) 59.944,122.682 59.944,118.618 ccw(c64.325,118.681) 64.389,114.3 64.389,114.315 70.993,114.315 cw(c71.056,109.934) 75.438,109.997 75.438,42.53 cw(c71.056,42.593) 70.993,38.212 64.389,38.212 64.389,38.227 ccw(c64.325,33.846) 59.944,33.909

## Silkscreen, mask and mechanical layers (free items; w line width, h text height)
Mechanical 13: